# EAGLE board clvHd_EMG-Panel (EAGLE 9.6.2), part 1 of 4
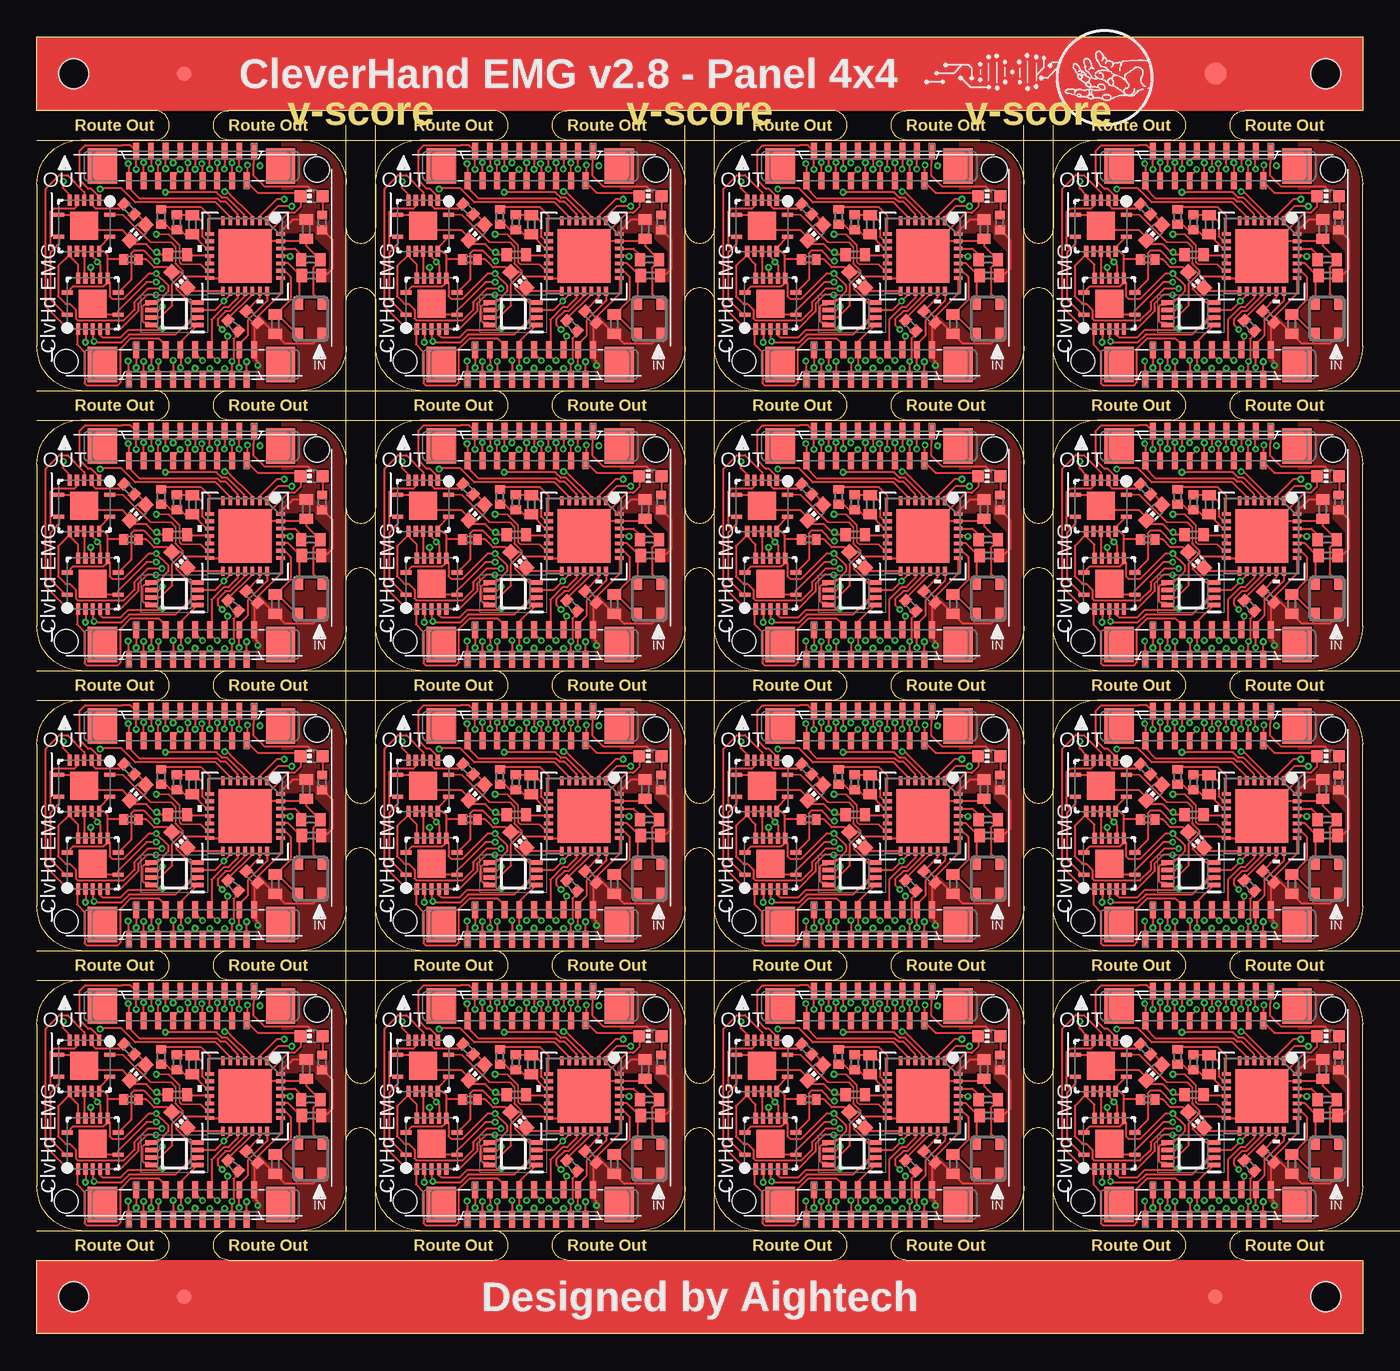
[diagram p0: board, top side]
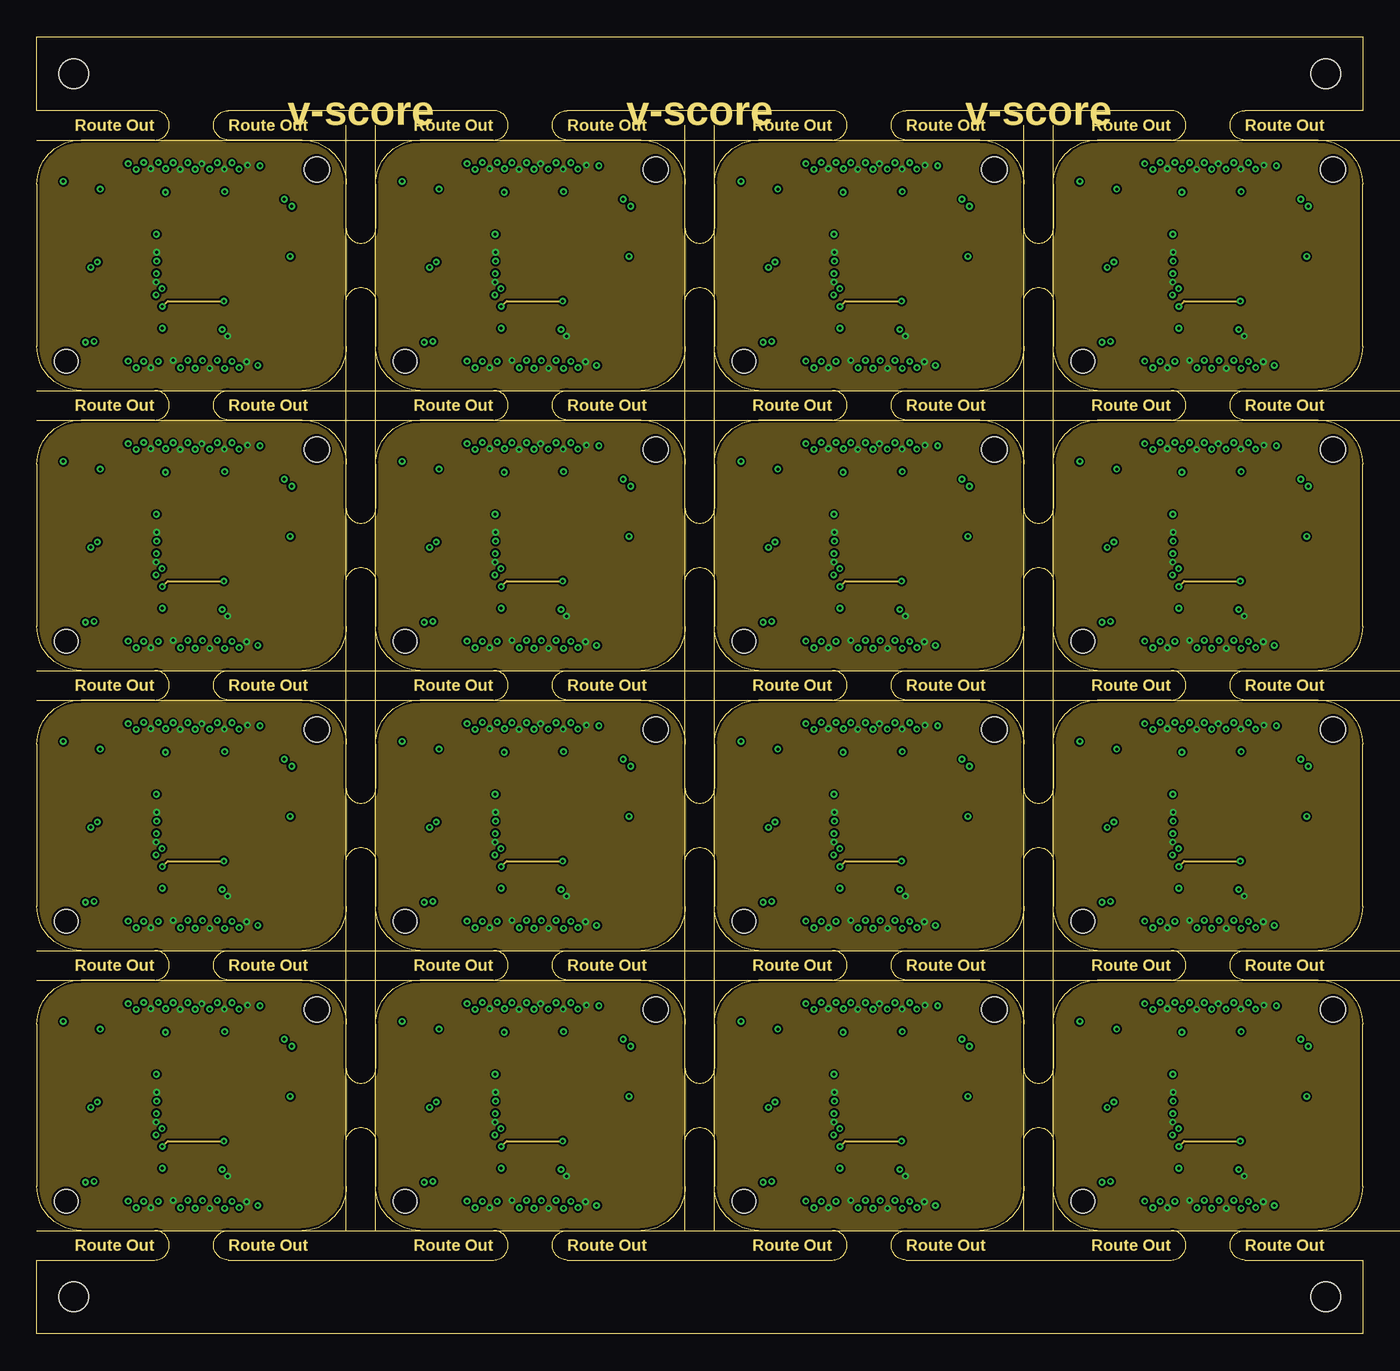
[diagram p1: board, inner layer Route2]
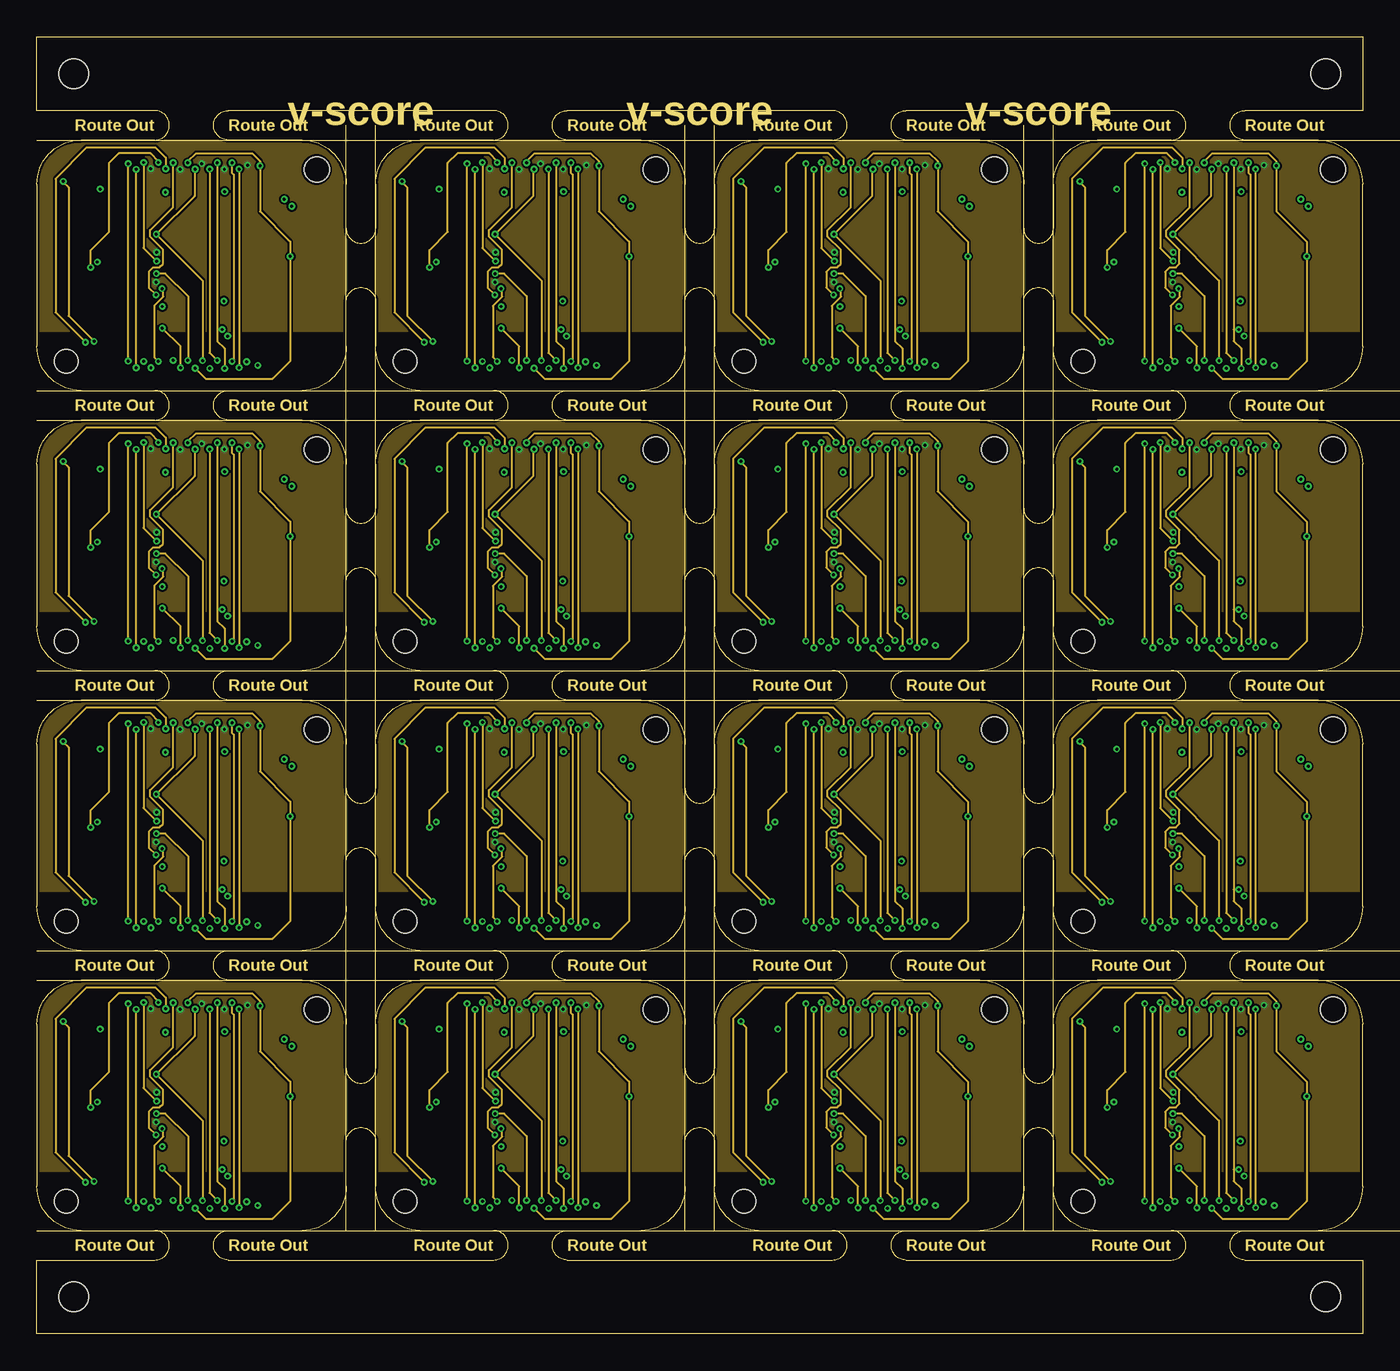
[diagram p2: board, inner layer Route15]
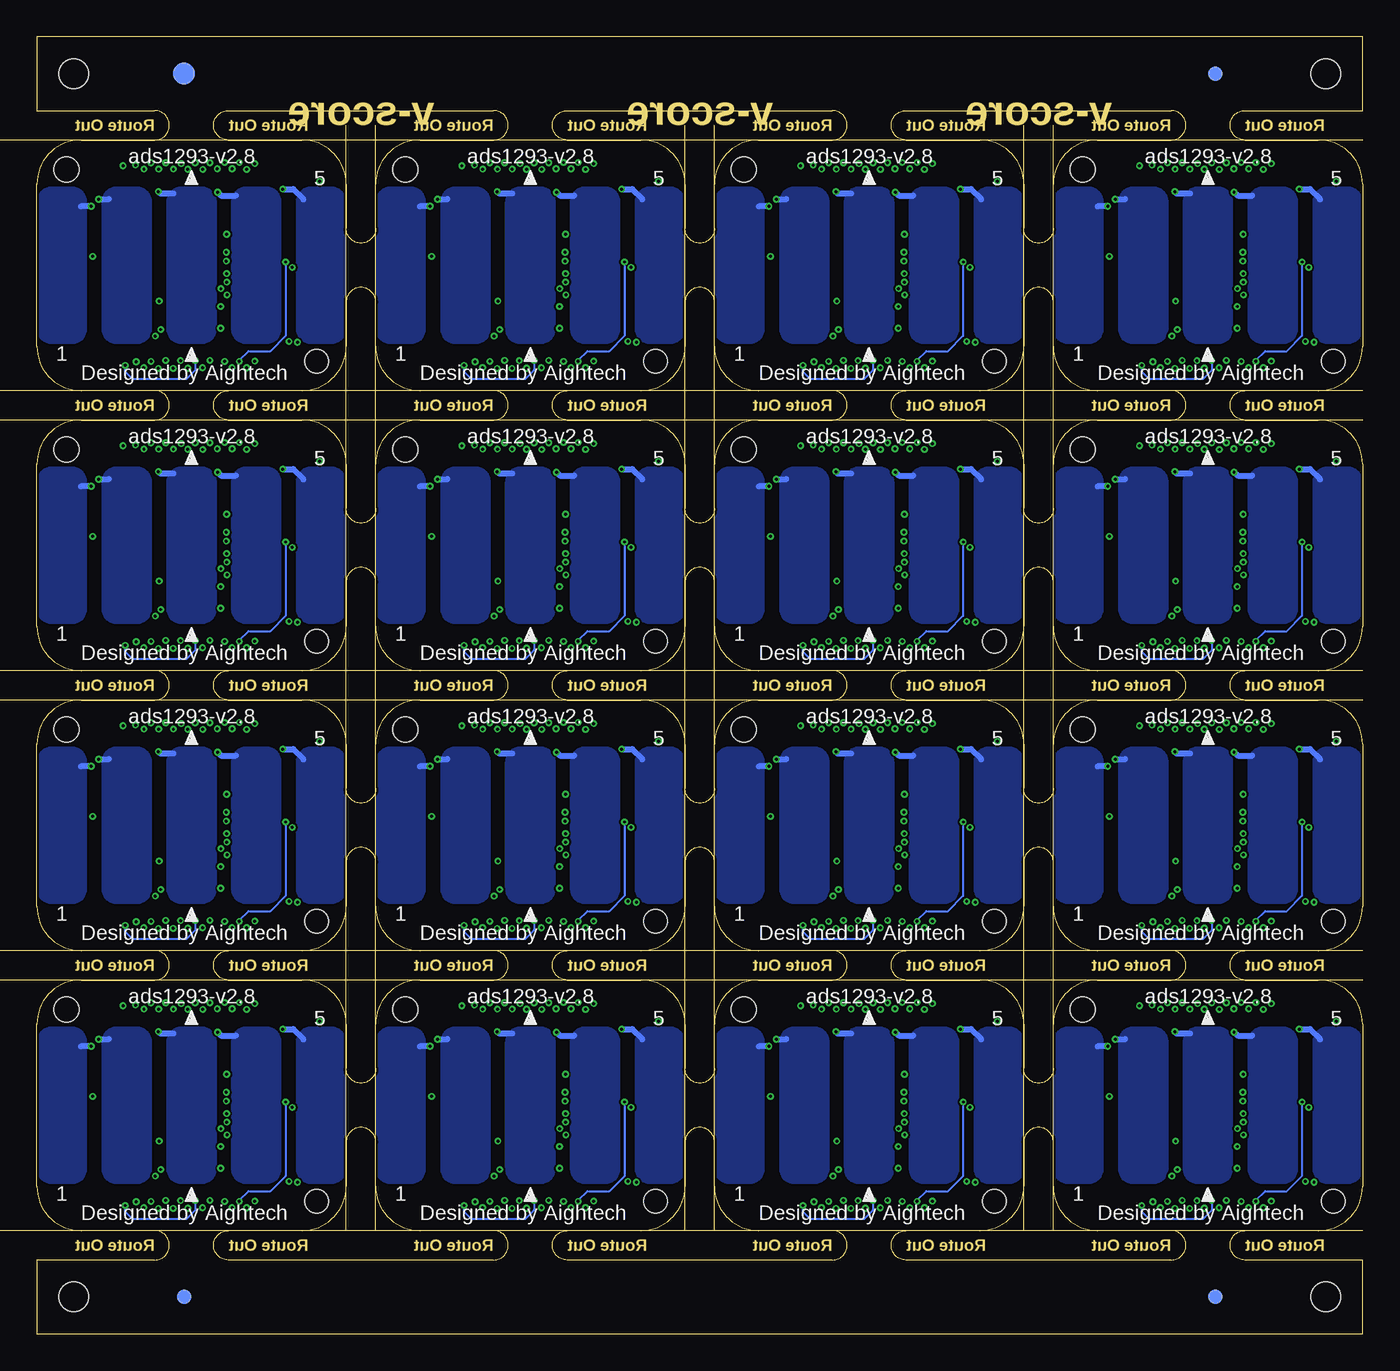
[diagram p3: board, bottom side, seen from below]

Size 90 x 88 mm. Coordinates in mm from the lower left corner, seen from the top.
Outline: 0,21 0,10 arc90 3,7 8,7 arc-180 8,5 0,5 0,0 90,0 90,5 82,5 arc-180 82,7 87,7 arc90 90,10 90,21 arc90 87,24 82,24 arc-180 82,26 87,26 arc90 90,29 90,40 arc90 87,43 82,43 arc-180 82,45 87,45 arc90 90,48 90,59 arc90 87,62 82,62 arc-180 82,64 87,64 arc90 90,67 90,78 arc90 87,81 82,81 arc-180 82,83 90,83 90,88 0,88 0,83 8,83 arc-180 8,81 3,81 arc90 0,78 0,67 arc90 3,64 8,64 arc-180 8,62 3,62 arc90 0,59 0,48 arc90 3,45 8,45 arc-180 8,43 3,43 arc90 0,40 0,29 arc90 3,26 8,26 arc-180 8,24 3,24 arc90 0,21
Outline: 13,7 18,7 arc90 21,10 21,13 arc-180 23,13 23,10 arc90 26,7 31,7 arc-180 31,5 13,5 arc-180 13,7
Outline: 21,18 21,21 arc90 18,24 13,24 arc-180 13,26 18,26 arc90 21,29 21,32 arc-180 23,32 23,29 arc90 26,26 31,26 arc-180 31,24 26,24 arc90 23,21 23,18 arc-180 21,18
Outline: 36,7 41,7 arc90 44,10 44,13 arc-180 46,13 46,10 arc90 49,7 54,7 arc-180 54,5 36,5 arc-180 36,7
Outline: 44,18 44,21 arc90 41,24 36,24 arc-180 36,26 41,26 arc90 44,29 44,32 arc-180 46,32 46,29 arc90 49,26 54,26 arc-180 54,24 49,24 arc90 46,21 46,18 arc-180 44,18
Outline: 59,7 64,7 arc90 67,10 67,13 arc-180 69,13 69,10 arc90 72,7 77,7 arc-180 77,5 59,5 arc-180 59,7
Outline: 67,18 67,21 arc90 64,24 59,24 arc-180 59,26 64,26 arc90 67,29 67,32 arc-180 69,32 69,29 arc90 72,26 77,26 arc-180 77,24 72,24 arc90 69,21 69,18 arc-180 67,18
Outline: 21,37 21,40 arc90 18,43 13,43 arc-180 13,45 18,45 arc90 21,48 21,51 arc-180 23,51 23,48 arc90 26,45 31,45 arc-180 31,43 26,43 arc90 23,40 23,37 arc-180 21,37
Outline: 44,37 44,40 arc90 41,43 36,43 arc-180 36,45 41,45 arc90 44,48 44,51 arc-180 46,51 46,48 arc90 49,45 54,45 arc-180 54,43 49,43 arc90 46,40 46,37 arc-180 44,37
Outline: 67,37 67,40 arc90 64,43 59,43 arc-180 59,45 64,45 arc90 67,48 67,51 arc-180 69,51 69,48 arc90 72,45 77,45 arc-180 77,43 72,43 arc90 69,40 69,37 arc-180 67,37
Outline: 21,56 21,59 arc90 18,62 13,62 arc-180 13,64 18,64 arc90 21,67 21,70 arc-180 23,70 23,67 arc90 26,64 31,64 arc-180 31,62 26,62 arc90 23,59 23,56 arc-180 21,56
Outline: 44,56 44,59 arc90 41,62 36,62 arc-180 36,64 41,64 arc90 44,67 44,70 arc-180 46,70 46,67 arc90 49,64 54,64 arc-180 54,62 49,62 arc90 46,59 46,56 arc-180 44,56
Outline: 67,56 67,59 arc90 64,62 59,62 arc-180 59,64 64,64 arc90 67,67 67,70 arc-180 69,70 69,67 arc90 72,64 77,64 arc-180 77,62 72,62 arc90 69,59 69,56 arc-180 67,56
Outline: 21,75 21,78 arc90 18,81 13,81 arc-180 13,83 31,83 arc-180 31,81 26,81 arc90 23,78 23,75 arc-180 21,75
Outline: 44,75 44,78 arc90 41,81 36,81 arc-180 36,83 54,83 arc-180 54,81 49,81 arc90 46,78 46,75 arc-180 44,75
Outline: 67,75 67,78 arc90 64,81 59,81 arc-180 59,83 77,83 arc-180 77,81 72,81 arc90 69,78 69,75 arc-180 67,75
Copper layers (1*2*15*16): Top 0.035559375mm / dielectric 0.47751875mm / Route2 0.035559375mm / dielectric 0.47751875mm / Route15 0.035559375mm / dielectric 0.47751875mm / Bottom 0.035559375mm
Design rules "clvHd_EMG": minimum track width 3.5mil, minimum drill 0.2mm, track to track 5mil, track to pad 5mil, pad to pad 5mil, via to via 5mil, smd to smd 5mil, copper to edge 7mil, drill to drill 7mil, minimum pad ring 5mil, minimum via ring 5mil, stop-mask expansion 2.5mil, vias tented up to drill 25mil, thermal gap 10mil
Holes 1.6 mm at 2,9 25,9 48,9 71,9 2,28 25,28 48,28 71,28 2,47 25,47 48,47 71,47 2,66 25,66 48,66 71,66
Holes 1.7 mm at 19,22 42,22 65,22 88,22 19,41 42,41 65,41 88,41 19,60 42,60 65,60 88,60 19,79 42,79 65,79 88,79
Holes 2 mm at 2.5,2.5 87.5,2.5 2.5,85.5 87.5,85.5
Milling: 14 lines

## Footprints (pad centres in the part's own frame; a part is rotated, then mirrored left to right if it is on the bottom)
X05C2018TZ = smd 1.15 x 0.4: 1 -1,4.25; 2 1,3.75; 3 -1,3.25; 4 1,2.75; 5 -1,2.25; 6 1,1.75; 7 -1,1.25; 8 1,0.75; 9 -1,0.25; 10 1,-0.25; 11 -1,-0.75; 12 1,-1.25; 13 -1,-1.75; 14 1,-2.25; 15 -1,-2.75; 16 1,-3.25; 17 -1,-3.75; 18 1,-4.25 | smd 2.4 x 2: M1 0,6.05; M2 0,-6.05
RSG28_3P6X3P6_TEX = smd 0.6 x 0.25: 1 -2.4,1.5; 2 -2.4,1; 3 -2.4,0.5; 4 -2.4,0; 5 -2.4,-0.5; 6 -2.4,-1; 7 -2.4,-1.5; 15 2.4,-1.5; 16 2.4,-1; 17 2.4,-0.5; 18 2.4,0; 19 2.4,0.5; 20 2.4,1; 21 2.4,1.5 | smd 0.25 x 0.6: 8 -1.5,-2.4; 9 -1,-2.4; 10 -0.5,-2.4; 11 0,-2.4; 12 0.5,-2.4; 13 1,-2.4; 14 1.5,-2.4; 22 1.5,2.4; 23 1,2.4; 24 0.5,2.4; 25 0,2.4; 26 -0.5,2.4; 27 -1,2.4; 28 -1.5,2.4 | smd 3.6 x 3.6: 29 0,0
C0402 = smd 0.7 x 0.9: 1 -0.65,0; 2 0.65,0
FIDUCIAL-1X2 = smd 1 x 1: 1 0,0
FIDUCIAL-1.5X3 = smd 1.5 x 1.5: 1 0,0
CHIP-LED0603 = smd 0.8 x 0.8: A 0,-0.75; C 0,0.75
VQFN-14-CUSTOM = smd 0.75 x 0.28: 1 -1.725,-0.75; 7 1.725,-0.75; 8 1.725,0.75; 14 -1.725,0.75 | smd 0.28 x 0.75: 2 -1,-1.725; 3 -0.5,-1.725; 4 0,-1.725; 5 0.5,-1.725; 6 1,-1.725; 9 1,1.725; 10 0.5,1.725; 11 0,1.725; 12 -0.5,1.725; 13 -1,1.725 | smd 1.9 x 1.9: 15 0,0
VSSOP = smd 0.85 x 0.3: 1 -1.575,0.75; 2 -1.575,0.25; 3 -1.575,-0.25; 4 -1.575,-0.75; 5 1.575,-0.75; 6 1.575,-0.25; 7 1.575,0.25; 8 1.575,0.75
R0402 = smd 0.6 x 0.7: 1 -0.5,0; 2 0.5,0
R0402' = smd 0.6 x 0.7: 1 -0.55,0; 2 0.55,0
SMD-3225_4P = smd 0.9 x 0.65: 1 -1.05,-0.825; 2 1.05,-0.825; 3 1.05,0.825; 4 -1.05,0.825

## Placement (x,y rotation side)
1  X05C2018TZ  [X05C2018TZ]  10.5,8.77 90 top
2  X05C2018TZ  [X05C2018TZ]  10.5,22.23 270 top
3  X05C2018TZ  [X05C2018TZ]  33.5,22.23 270 top
4  X05C2018TZ  [X05C2018TZ]  33.5,8.77 90 top
5  X05C2018TZ  [X05C2018TZ]  56.5,22.23 270 top
6  X05C2018TZ  [X05C2018TZ]  56.5,8.77 90 top
7  X05C2018TZ  [X05C2018TZ]  79.5,22.23 270 top
8  X05C2018TZ  [X05C2018TZ]  79.5,8.77 90 top
9  X05C2018TZ  [X05C2018TZ]  10.5,41.23 270 top
10  X05C2018TZ  [X05C2018TZ]  10.5,27.77 90 top
11  X05C2018TZ  [X05C2018TZ]  33.5,41.23 270 top
12  X05C2018TZ  [X05C2018TZ]  33.5,27.77 90 top
13  X05C2018TZ  [X05C2018TZ]  56.5,41.23 270 top
14  X05C2018TZ  [X05C2018TZ]  56.5,27.77 90 top
15  X05C2018TZ  [X05C2018TZ]  79.5,41.23 270 top
16  X05C2018TZ  [X05C2018TZ]  79.5,27.77 90 top
17  X05C2018TZ  [X05C2018TZ]  10.5,60.23 270 top
18  X05C2018TZ  [X05C2018TZ]  10.5,46.77 90 top
19  X05C2018TZ  [X05C2018TZ]  33.5,60.23 270 top
20  X05C2018TZ  [X05C2018TZ]  33.5,46.77 90 top
21  X05C2018TZ  [X05C2018TZ]  56.5,60.23 270 top
22  X05C2018TZ  [X05C2018TZ]  56.5,46.77 90 top
23  X05C2018TZ  [X05C2018TZ]  79.5,60.23 270 top
24  X05C2018TZ  [X05C2018TZ]  79.5,46.77 90 top
25  X05C2018TZ  [X05C2018TZ]  10.5,79.23 270 top
26  X05C2018TZ  [X05C2018TZ]  10.5,65.77 90 top
27  X05C2018TZ  [X05C2018TZ]  33.5,79.23 270 top
28  X05C2018TZ  [X05C2018TZ]  33.5,65.77 90 top
29  X05C2018TZ  [X05C2018TZ]  56.5,79.23 270 top
30  X05C2018TZ  [X05C2018TZ]  56.5,65.77 90 top
31  X05C2018TZ  [X05C2018TZ]  79.5,79.23 270 top
32  X05C2018TZ  [X05C2018TZ]  79.5,65.77 90 top
ADC  ADS1293CISQ/NOPB  [RSG28_3P6X3P6_TEX]  14.14,16.13 270 top
ADC1  ADS1293CISQ/NOPB  [RSG28_3P6X3P6_TEX]  37.14,16.13 270 top
ADC2  ADS1293CISQ/NOPB  [RSG28_3P6X3P6_TEX]  60.14,16.13 270 top
ADC3  ADS1293CISQ/NOPB  [RSG28_3P6X3P6_TEX]  83.14,16.13 270 top
ADC4  ADS1293CISQ/NOPB  [RSG28_3P6X3P6_TEX]  14.14,35.13 270 top
ADC5  ADS1293CISQ/NOPB  [RSG28_3P6X3P6_TEX]  37.14,35.13 270 top
ADC6  ADS1293CISQ/NOPB  [RSG28_3P6X3P6_TEX]  60.14,35.13 270 top
ADC7  ADS1293CISQ/NOPB  [RSG28_3P6X3P6_TEX]  83.14,35.13 270 top
ADC8  ADS1293CISQ/NOPB  [RSG28_3P6X3P6_TEX]  14.14,54.13 270 top
ADC9  ADS1293CISQ/NOPB  [RSG28_3P6X3P6_TEX]  37.14,54.13 270 top
ADC10  ADS1293CISQ/NOPB  [RSG28_3P6X3P6_TEX]  60.14,54.13 270 top
ADC11  ADS1293CISQ/NOPB  [RSG28_3P6X3P6_TEX]  83.14,54.13 270 top
ADC12  ADS1293CISQ/NOPB  [RSG28_3P6X3P6_TEX]  14.14,73.13 270 top
ADC13  ADS1293CISQ/NOPB  [RSG28_3P6X3P6_TEX]  37.14,73.13 270 top
ADC14  ADS1293CISQ/NOPB  [RSG28_3P6X3P6_TEX]  60.14,73.13 270 top
ADC15  ADS1293CISQ/NOPB  [RSG28_3P6X3P6_TEX]  83.14,73.13 270 top
C1  22pF  [C0402]  16.19,11.5 90 top
C2  22pF  [C0402]  18.65,14.8 180 top
C3  1nF  [C0402]  10.57,18.25 90 top
C4  100nF  [C0402]  18.29,17.95 270 top
C5  100nF  [C0402]  9.56,16.21 180 top
C6  1uF  [C0402]  18.59,15.88 0 top
C7  22pF  [C0402]  41.65,14.8 180 top
C8  22pF  [C0402]  39.19,11.5 90 top
C9  100nF  [C0402]  32.56,16.21 180 top
C10  1nF  [C0402]  33.57,18.25 90 top
C11  100nF  [C0402]  41.29,17.95 270 top
C12  1uF  [C0402]  41.59,15.88 0 top
C13  22pF  [C0402]  64.65,14.8 180 top
C14  22pF  [C0402]  62.19,11.5 90 top
C15  100nF  [C0402]  55.56,16.21 180 top
C16  1nF  [C0402]  56.57,18.25 90 top
C17  100nF  [C0402]  64.29,17.95 270 top
C18  1uF  [C0402]  64.59,15.88 0 top
C19  22pF  [C0402]  87.65,14.8 180 top
C20  22pF  [C0402]  85.19,11.5 90 top
C21  100nF  [C0402]  78.56,16.21 180 top
C22  1nF  [C0402]  79.57,18.25 90 top
C23  100nF  [C0402]  87.29,17.95 270 top
C24  1uF  [C0402]  87.59,15.88 0 top
C25  22pF  [C0402]  18.65,33.8 180 top
C26  22pF  [C0402]  16.19,30.5 90 top
C27  100nF  [C0402]  9.56,35.21 180 top
C28  1nF  [C0402]  10.57,37.25 90 top
C29  100nF  [C0402]  18.29,36.95 270 top
C30  1uF  [C0402]  18.59,34.88 0 top
C31  22pF  [C0402]  41.65,33.8 180 top
C32  22pF  [C0402]  39.19,30.5 90 top
C33  100nF  [C0402]  32.56,35.21 180 top
C34  1nF  [C0402]  33.57,37.25 90 top
C35  100nF  [C0402]  41.29,36.95 270 top
C36  1uF  [C0402]  41.59,34.88 0 top
C37  22pF  [C0402]  64.65,33.8 180 top
C38  22pF  [C0402]  62.19,30.5 90 top
C39  100nF  [C0402]  55.56,35.21 180 top
C40  1nF  [C0402]  56.57,37.25 90 top
C41  100nF  [C0402]  64.29,36.95 270 top
C42  1uF  [C0402]  64.59,34.88 0 top
C43  22pF  [C0402]  87.65,33.8 180 top
C44  22pF  [C0402]  85.19,30.5 90 top
C45  100nF  [C0402]  78.56,35.21 180 top
C46  1nF  [C0402]  79.57,37.25 90 top
C47  100nF  [C0402]  87.29,36.95 270 top
C48  1uF  [C0402]  87.59,34.88 0 top
C49  22pF  [C0402]  18.65,52.8 180 top
C50  22pF  [C0402]  16.19,49.5 90 top
C51  100nF  [C0402]  9.56,54.21 180 top
C52  1nF  [C0402]  10.57,56.25 90 top
C53  100nF  [C0402]  18.29,55.95 270 top
C54  1uF  [C0402]  18.59,53.88 0 top
C55  22pF  [C0402]  41.65,52.8 180 top
C56  22pF  [C0402]  39.19,49.5 90 top
C57  100nF  [C0402]  32.56,54.21 180 top
C58  1nF  [C0402]  33.57,56.25 90 top
C59  100nF  [C0402]  41.29,55.95 270 top
C60  1uF  [C0402]  41.59,53.88 0 top
C61  22pF  [C0402]  64.65,52.8 180 top
C62  22pF  [C0402]  62.19,49.5 90 top
C63  100nF  [C0402]  55.56,54.21 180 top
C64  1nF  [C0402]  56.57,56.25 90 top
C65  100nF  [C0402]  64.29,55.95 270 top
C66  1uF  [C0402]  64.59,53.88 0 top
C67  22pF  [C0402]  87.65,52.8 180 top
C68  22pF  [C0402]  85.19,49.5 90 top
C69  100nF  [C0402]  78.56,54.21 180 top
C70  1nF  [C0402]  79.57,56.25 90 top
C71  100nF  [C0402]  87.29,55.95 270 top
C72  1uF  [C0402]  87.59,53.88 0 top
C73  22pF  [C0402]  18.65,71.8 180 top
C74  22pF  [C0402]  16.19,68.5 90 top
C75  100nF  [C0402]  9.56,73.21 180 top
C76  1nF  [C0402]  10.57,75.25 90 top
C77  100nF  [C0402]  18.29,74.95 270 top
C78  1uF  [C0402]  18.59,72.88 0 top
C79  22pF  [C0402]  41.65,71.8 180 top
C80  22pF  [C0402]  39.19,68.5 90 top
C81  100nF  [C0402]  32.56,73.21 180 top
C82  1nF  [C0402]  33.57,75.25 90 top
C83  100nF  [C0402]  41.29,74.95 270 top
C84  1uF  [C0402]  41.59,72.88 0 top
C85  22pF  [C0402]  64.65,71.8 180 top
C86  22pF  [C0402]  62.19,68.5 90 top
C87  100nF  [C0402]  55.56,73.21 180 top
C88  1nF  [C0402]  56.57,75.25 90 top
C89  100nF  [C0402]  64.29,74.95 270 top
C90  1uF  [C0402]  64.59,72.88 0 top
C91  22pF  [C0402]  87.65,71.8 180 top
C92  22pF  [C0402]  85.19,68.5 90 top
C93  100nF  [C0402]  78.56,73.21 180 top
C94  1nF  [C0402]  79.57,75.25 90 top
C95  100nF  [C0402]  87.29,74.95 270 top
C96  1uF  [C0402]  87.59,72.88 0 top
E$1  [FIDUCIAL-1X2]  10,2.5 0 top
E$2  [FIDUCIAL-1X2]  10,2.5 0 bottom
E$3  [FIDUCIAL-1X2]  80,2.5 0 top
E$4  [FIDUCIAL-1X2]  80,2.5 0 bottom
E$5  [FIDUCIAL-1X2]  10,85.5 0 top
E$6  [FIDUCIAL-1X2]  10,85.5 0 bottom
E$7  [FIDUCIAL-1.5X3]  80,85.5 0 top
E$8  [FIDUCIAL-1.5X3]  80,85.5 0 bottom
L1  Green  [CHIP-LED0603]  18.65,20.19 90 top
L2  Red  [CHIP-LED0603]  9.69,14.51 225 top
L3  White  [CHIP-LED0603]  6.85,17.72 135 top
L4  Red  [CHIP-LED0603]  32.69,14.51 225 top
L5  Green  [CHIP-LED0603]  41.65,20.19 90 top
L6  White  [CHIP-LED0603]  29.85,17.72 135 top
L7  Red  [CHIP-LED0603]  55.69,14.51 225 top
L8  Green  [CHIP-LED0603]  64.65,20.19 90 top
L9  White  [CHIP-LED0603]  52.85,17.72 135 top
L10  Red  [CHIP-LED0603]  78.69,14.51 225 top
L11  Green  [CHIP-LED0603]  87.65,20.19 90 top
L12  White  [CHIP-LED0603]  75.85,17.72 135 top
L13  Red  [CHIP-LED0603]  9.69,33.51 225 top
L14  Green  [CHIP-LED0603]  18.65,39.19 90 top
L15  White  [CHIP-LED0603]  6.85,36.72 135 top
L16  Red  [CHIP-LED0603]  32.69,33.51 225 top
L17  Green  [CHIP-LED0603]  41.65,39.19 90 top
L18  White  [CHIP-LED0603]  29.85,36.72 135 top
L19  Red  [CHIP-LED0603]  55.69,33.51 225 top
L20  Green  [CHIP-LED0603]  64.65,39.19 90 top
L21  White  [CHIP-LED0603]  52.85,36.72 135 top
L22  Red  [CHIP-LED0603]  78.69,33.51 225 top
L23  Green  [CHIP-LED0603]  87.65,39.19 90 top
L24  White  [CHIP-LED0603]  75.85,36.72 135 top
L25  Red  [CHIP-LED0603]  9.69,52.51 225 top
L26  Green  [CHIP-LED0603]  18.65,58.19 90 top
L27  White  [CHIP-LED0603]  6.85,55.72 135 top
L28  Red  [CHIP-LED0603]  32.69,52.51 225 top
L29  Green  [CHIP-LED0603]  41.65,58.19 90 top
L30  White  [CHIP-LED0603]  29.85,55.72 135 top
L31  Red  [CHIP-LED0603]  55.69,52.51 225 top
L32  Green  [CHIP-LED0603]  64.65,58.19 90 top
L33  White  [CHIP-LED0603]  52.85,55.72 135 top
L34  Red  [CHIP-LED0603]  78.69,52.51 225 top
L35  Green  [CHIP-LED0603]  87.65,58.19 90 top
L36  White  [CHIP-LED0603]  75.85,55.72 135 top
L37  Red  [CHIP-LED0603]  9.69,71.51 225 top
L38  Green  [CHIP-LED0603]  18.65,77.19 90 top
L39  White  [CHIP-LED0603]  6.85,74.72 135 top
L40  Red  [CHIP-LED0603]  32.69,71.51 225 top
L41  Green  [CHIP-LED0603]  41.65,77.19 90 top
L42  White  [CHIP-LED0603]  29.85,74.72 135 top
L43  Red  [CHIP-LED0603]  55.69,71.51 225 top
L44  Green  [CHIP-LED0603]  64.65,77.19 90 top
L45  White  [CHIP-LED0603]  52.85,74.72 135 top
L46  Red  [CHIP-LED0603]  78.69,71.51 225 top
L47  Green  [CHIP-LED0603]  87.65,77.19 90 top
L48  White  [CHIP-LED0603]  75.85,74.72 135 top
L_AND  SN74ALVC08  [VQFN-14-CUSTOM]  3.23,18.18 180 top
L_AND1  SN74ALVC08  [VQFN-14-CUSTOM]  26.23,18.18 180 top
L_AND2  SN74ALVC08  [VQFN-14-CUSTOM]  49.23,18.18 180 top
L_AND3  SN74ALVC08  [VQFN-14-CUSTOM]  72.22,18.18 180 top
L_AND4  SN74ALVC08  [VQFN-14-CUSTOM]  3.23,37.17 180 top
L_AND5  SN74ALVC08  [VQFN-14-CUSTOM]  26.23,37.17 180 top
L_AND6  SN74ALVC08  [VQFN-14-CUSTOM]  49.23,37.17 180 top
L_AND7  SN74ALVC08  [VQFN-14-CUSTOM]  72.22,37.17 180 top
L_AND8  SN74ALVC08  [VQFN-14-CUSTOM]  3.23,56.17 180 top
L_AND9  SN74ALVC08  [VQFN-14-CUSTOM]  26.23,56.17 180 top
L_AND10  SN74ALVC08  [VQFN-14-CUSTOM]  49.23,56.17 180 top
L_AND11  SN74ALVC08  [VQFN-14-CUSTOM]  72.22,56.17 180 top
L_AND12  SN74ALVC08  [VQFN-14-CUSTOM]  3.23,75.17 180 top
L_AND13  SN74ALVC08  [VQFN-14-CUSTOM]  26.23,75.17 180 top
L_AND14  SN74ALVC08  [VQFN-14-CUSTOM]  49.23,75.17 180 top
L_AND15  SN74ALVC08  [VQFN-14-CUSTOM]  72.22,75.17 180 top
L_NAND  SN74AUP2G00  [VSSOP]  9.34,12.21 180 top
L_NAND1  SN74AUP2G00  [VSSOP]  32.34,12.21 180 top
L_NAND2  SN74AUP2G00  [VSSOP]  55.34,12.21 180 top
L_NAND3  SN74AUP2G00  [VSSOP]  78.34,12.21 180 top
L_NAND4  SN74AUP2G00  [VSSOP]  9.34,31.21 180 top
L_NAND5  SN74AUP2G00  [VSSOP]  32.34,31.21 180 top
L_NAND6  SN74AUP2G00  [VSSOP]  55.34,31.21 180 top
L_NAND7  SN74AUP2G00  [VSSOP]  78.34,31.21 180 top
L_NAND8  SN74AUP2G00  [VSSOP]  9.34,50.21 180 top
L_NAND9  SN74AUP2G00  [VSSOP]  32.34,50.21 180 top
L_NAND10  SN74AUP2G00  [VSSOP]  55.34,50.21 180 top
L_NAND11  SN74AUP2G00  [VSSOP]  78.34,50.21 180 top
L_NAND12  SN74AUP2G00  [VSSOP]  9.34,69.21 180 top
L_NAND13  SN74AUP2G00  [VSSOP]  32.34,69.21 180 top
L_NAND14  SN74AUP2G00  [VSSOP]  55.34,69.21 180 top
L_NAND15  SN74AUP2G00  [VSSOP]  78.34,69.21 180 top
L_XOR  SN74LVC86  [VQFN-14-CUSTOM]  3.8,12.9 0 top
L_XOR1  SN74LVC86  [VQFN-14-CUSTOM]  26.8,12.9 0 top
L_XOR2  SN74LVC86  [VQFN-14-CUSTOM]  49.8,12.9 0 top
L_XOR3  SN74LVC86  [VQFN-14-CUSTOM]  72.8,12.9 0 top
L_XOR4  SN74LVC86  [VQFN-14-CUSTOM]  3.8,31.9 0 top
L_XOR5  SN74LVC86  [VQFN-14-CUSTOM]  26.8,31.9 0 top
L_XOR6  SN74LVC86  [VQFN-14-CUSTOM]  49.8,31.9 0 top
L_XOR7  SN74LVC86  [VQFN-14-CUSTOM]  72.8,31.9 0 top
L_XOR8  SN74LVC86  [VQFN-14-CUSTOM]  3.8,50.9 0 top
L_XOR9  SN74LVC86  [VQFN-14-CUSTOM]  26.8,50.9 0 top
L_XOR10  SN74LVC86  [VQFN-14-CUSTOM]  49.8,50.9 0 top
L_XOR11  SN74LVC86  [VQFN-14-CUSTOM]  72.8,50.9 0 top
L_XOR12  SN74LVC86  [VQFN-14-CUSTOM]  3.8,69.9 0 top
L_XOR13  SN74LVC86  [VQFN-14-CUSTOM]  26.8,69.9 0 top
L_XOR14  SN74LVC86  [VQFN-14-CUSTOM]  49.8,69.9 0 top
L_XOR15  SN74LVC86  [VQFN-14-CUSTOM]  72.8,69.9 0 top
R1  51  [R0402]  19.37,18.41 90 top
R2  51  [R0402]  13.32,11.4 315 top
R3  51  [R0402]  6.26,19.3 135 top
R4  51  [R0402]  6.4,15.9 180 top
R5  10k  [R0402]  8.44,18.78 270 top
R6  1M  [R0402']  14.6,12 315 top
R7  10M  [R0402]  9.51,18.42 270 top
R8  51  [R0402]  36.32,11.4 315 top
R9  51  [R0402]  29.4,15.9 180 top
R10  1M  [R0402']  37.6,12 315 top
R11  10k  [R0402]  31.44,18.78 270 top
R12  10M  [R0402]  32.51,18.42 270 top
R13  51  [R0402]  42.37,18.41 90 top
R14  51  [R0402]  29.26,19.3 135 top
R15  51  [R0402]  59.32,11.4 315 top
R16  51  [R0402]  52.4,15.9 180 top
R17  1M  [R0402']  60.6,12 315 top
R18  10k  [R0402]  54.44,18.78 270 top
R19  10M  [R0402]  55.51,18.42 270 top
R20  51  [R0402]  65.37,18.41 90 top
R21  51  [R0402]  52.26,19.3 135 top
R22  51  [R0402]  82.32,11.4 315 top
R23  51  [R0402]  75.4,15.9 180 top
R24  1M  [R0402']  83.6,12 315 top
R25  10k  [R0402]  77.44,18.78 270 top
R26  10M  [R0402]  78.51,18.42 270 top
R27  51  [R0402]  88.37,18.41 90 top
R28  51  [R0402]  75.26,19.3 135 top
R29  51  [R0402]  13.32,30.4 315 top
R30  51  [R0402]  6.4,34.9 180 top
R31  1M  [R0402']  14.6,31 315 top
R32  10k  [R0402]  8.44,37.78 270 top
R33  10M  [R0402]  9.51,37.42 270 top
R34  51  [R0402]  19.37,37.41 90 top
R35  51  [R0402]  6.26,38.3 135 top
R36  51  [R0402]  36.32,30.4 315 top
R37  51  [R0402]  29.4,34.9 180 top
R38  1M  [R0402']  37.6,31 315 top
R39  10k  [R0402]  31.44,37.78 270 top
R40  10M  [R0402]  32.51,37.42 270 top
R41  51  [R0402]  42.37,37.41 90 top
R42  51  [R0402]  29.26,38.3 135 top
R43  51  [R0402]  59.32,30.4 315 top
R44  51  [R0402]  52.4,34.9 180 top
R45  1M  [R0402']  60.6,31 315 top
R46  10k  [R0402]  54.44,37.78 270 top
R47  10M  [R0402]  55.51,37.42 270 top
R48  51  [R0402]  65.37,37.41 90 top
R49  51  [R0402]  52.26,38.3 135 top
R50  51  [R0402]  82.32,30.4 315 top
R51  51  [R0402]  75.4,34.9 180 top
R52  1M  [R0402']  83.6,31 315 top
R53  10k  [R0402]  77.44,37.78 270 top
R54  10M  [R0402]  78.51,37.42 270 top
R55  51  [R0402]  88.37,37.41 90 top
R56  51  [R0402]  75.26,38.3 135 top
R57  51  [R0402]  13.32,49.4 315 top
R58  51  [R0402]  6.4,53.9 180 top
R59  1M  [R0402']  14.6,50 315 top
R60  10k  [R0402]  8.44,56.78 270 top
R61  10M  [R0402]  9.51,56.42 270 top
R62  51  [R0402]  19.37,56.41 90 top
R63  51  [R0402]  6.26,57.3 135 top
R64  51  [R0402]  36.32,49.4 315 top
R65  51  [R0402]  29.4,53.9 180 top
R66  1M  [R0402']  37.6,50 315 top
R67  10k  [R0402]  31.44,56.78 270 top
R68  10M  [R0402]  32.51,56.42 270 top
R69  51  [R0402]  42.37,56.41 90 top
R70  51  [R0402]  29.26,57.3 135 top
R71  51  [R0402]  59.32,49.4 315 top
R72  51  [R0402]  52.4,53.9 180 top
R73  1M  [R0402']  60.6,50 315 top
R74  10k  [R0402]  54.44,56.78 270 top
R75  10M  [R0402]  55.51,56.42 270 top
R76  51  [R0402]  65.37,56.41 90 top
R77  51  [R0402]  52.26,57.3 135 top
R78  51  [R0402]  82.32,49.4 315 top
R79  51  [R0402]  75.4,53.9 180 top
R80  1M  [R0402']  83.6,50 315 top
R81  10k  [R0402]  77.44,56.78 270 top
R82  10M  [R0402]  78.51,56.42 270 top
R83  51  [R0402]  88.37,56.41 90 top
R84  51  [R0402]  75.26,57.3 135 top
R85  51  [R0402]  13.32,68.4 315 top
R86  51  [R0402]  6.4,72.9 180 top
R87  1M  [R0402']  14.6,69 315 top
R88  10k  [R0402]  8.44,75.78 270 top
R89  10M  [R0402]  9.51,75.42 270 top
R90  51  [R0402]  19.37,75.41 90 top
R91  51  [R0402]  6.26,76.3 135 top
R92  51  [R0402]  36.32,68.4 315 top
R93  51  [R0402]  29.4,72.9 180 top
R94  1M  [R0402']  37.6,69 315 top
R95  10k  [R0402]  31.44,75.78 270 top
R96  10M  [R0402]  32.51,75.42 270 top
R97  51  [R0402]  42.37,75.41 90 top
R98  51  [R0402]  29.26,76.3 135 top
R99  51  [R0402]  59.32,68.4 315 top
R100  51  [R0402]  52.4,72.9 180 top
R101  1M  [R0402']  60.6,69 315 top
R102  10k  [R0402]  54.44,75.78 270 top
R103  10M  [R0402]  55.51,75.42 270 top
R104  51  [R0402]  65.37,75.41 90 top
R105  51  [R0402]  52.26,76.3 135 top
R106  51  [R0402]  82.32,68.4 315 top
R107  51  [R0402]  75.4,72.9 180 top
R108  1M  [R0402']  83.6,69 315 top
R109  10k  [R0402]  77.44,75.78 270 top
R110  10M  [R0402]  78.51,75.42 270 top
R111  51  [R0402]  88.37,75.41 90 top
R112  51  [R0402]  75.26,76.3 135 top
TAL  C387328  [SMD-3225_4P]  18.57,11.87 90 top
TAL1  C387328  [SMD-3225_4P]  41.58,11.87 90 top
TAL2  C387328  [SMD-3225_4P]  64.58,11.87 90 top
TAL3  C387328  [SMD-3225_4P]  87.58,11.87 90 top
TAL4  C387328  [SMD-3225_4P]  18.57,30.87 90 top
TAL5  C387328  [SMD-3225_4P]  41.58,30.87 90 top
TAL6  C387328  [SMD-3225_4P]  64.58,30.87 90 top
TAL7  C387328  [SMD-3225_4P]  87.58,30.87 90 top
TAL8  C387328  [SMD-3225_4P]  18.57,49.87 90 top
TAL9  C387328  [SMD-3225_4P]  41.58,49.87 90 top
TAL10  C387328  [SMD-3225_4P]  64.58,49.87 90 top
TAL11  C387328  [SMD-3225_4P]  87.58,49.87 90 top
TAL12  C387328  [SMD-3225_4P]  18.57,68.87 90 top
TAL13  C387328  [SMD-3225_4P]  41.58,68.87 90 top
TAL14  C387328  [SMD-3225_4P]  64.58,68.87 90 top
TAL15  C387328  [SMD-3225_4P]  87.58,68.87 90 top

## Library data of the parts
1-32 = con-omron
ADC ADC1-ADC15 = ADS; BUILT_BY: EMA_UL_Team; MANUFACTURER_PART_NUMBER: ADS1293CISQ/NOPB; SOURCELIBRARY: TI_2016-05-20; VENDOR: Texas Instruments
C1-C96 = rcl; SPICEPREFIX: C
E$1-E$6 = SparkFun-Aesthetics
E$7 E$8 = SparkFun-Retired
L1-L48 = led
L_AND L_AND1-L_AND15 L_XOR L_XOR1-L_XOR15 = SamacSys_Parts
L_NAND L_NAND1-L_NAND15 = 1persoLib
R1-R5 R7-R9 R11-R16 R18-R23 R25-R30 R32-R37 R39-R44 R46-R51 R53-R58 R60-R65 R67-R72 R74-R79 R81-R86 R88-R93 R95-R100 R102-R107 R109-R112 = rcl; SPICEPREFIX: R
R6 R10 R17 R24 R31 R38 R45 R52 R59 R66 R73 R80 R87 R94 R101 R108 = rclCustom; SPICEPREFIX: R
TAL TAL1-TAL15 = crystalCustom; OC_FARNELL: unknown; OC_NEWARK: unknown

## Nets
A0: 1.3 L_AND.12 L_XOR.10
A1: 1.5 L_AND.9 L_XOR.13
A2: 1.6 L_AND.4 L_XOR.2
A3: 1.8 L_NAND.1 L_XOR.5
A4: 4.5 L_AND1.9 L_XOR1.13
A5: 4.6 L_AND1.4 L_XOR1.2
A6: 4.8 L_NAND1.1 L_XOR1.5
A7: 4.3 L_AND1.12 L_XOR1.10
A8: 6.5 L_AND2.9 L_XOR2.13
A9: 6.6 L_AND2.4 L_XOR2.2
A10: 6.8 L_NAND2.1 L_XOR2.5
A11: 6.3 L_AND2.12 L_XOR2.10
A12: 8.5 L_AND3.9 L_XOR3.13
A13: 8.6 L_AND3.4 L_XOR3.2
A14: 8.8 L_NAND3.1 L_XOR3.5
A15: 8.3 L_AND3.12 L_XOR3.10
A16: 10.5 L_AND4.9 L_XOR4.13
A17: 10.6 L_AND4.4 L_XOR4.2
A18: 10.8 L_NAND4.1 L_XOR4.5
A19: 10.3 L_AND4.12 L_XOR4.10
A20: 12.5 L_AND5.9 L_XOR5.13
A21: 12.6 L_AND5.4 L_XOR5.2
A22: 12.8 L_NAND5.1 L_XOR5.5
A23: 12.3 L_AND5.12 L_XOR5.10
A24: 14.5 L_AND6.9 L_XOR6.13
A25: 14.6 L_AND6.4 L_XOR6.2
A26: 14.8 L_NAND6.1 L_XOR6.5
A27: 14.3 L_AND6.12 L_XOR6.10
A28: 16.5 L_AND7.9 L_XOR7.13
A29: 16.6 L_AND7.4 L_XOR7.2
A30: 16.8 L_NAND7.1 L_XOR7.5
A31: 16.3 L_AND7.12 L_XOR7.10
A32: 18.5 L_AND8.9 L_XOR8.13
A33: 18.6 L_AND8.4 L_XOR8.2
A34: 18.8 L_NAND8.1 L_XOR8.5
A35: 18.3 L_AND8.12 L_XOR8.10
A36: 20.5 L_AND9.9 L_XOR9.13
A37: 20.6 L_AND9.4 L_XOR9.2
A38: 20.8 L_NAND9.1 L_XOR9.5
A39: 20.3 L_AND9.12 L_XOR9.10
A40: 22.5 L_AND10.9 L_XOR10.13
A41: 22.6 L_AND10.4 L_XOR10.2
A42: 22.8 L_NAND10.1 L_XOR10.5
A43: 22.3 L_AND10.12 L_XOR10.10
A44: 24.5 L_AND11.9 L_XOR11.13
A45: 24.6 L_AND11.4 L_XOR11.2
A46: 24.8 L_NAND11.1 L_XOR11.5
A47: 24.3 L_AND11.12 L_XOR11.10
A48: 26.5 L_AND12.9 L_XOR12.13
A49: 26.6 L_AND12.4 L_XOR12.2
A50: 26.8 L_NAND12.1 L_XOR12.5
A51: 26.3 L_AND12.12 L_XOR12.10
A52: 28.5 L_AND13.9 L_XOR13.13
A53: 28.6 L_AND13.4 L_XOR13.2
A54: 28.8 L_NAND13.1 L_XOR13.5
A55: 28.3 L_AND13.12 L_XOR13.10
A56: 30.5 L_AND14.9 L_XOR14.13
A57: 30.6 L_AND14.4 L_XOR14.2
A58: 30.8 L_NAND14.1 L_XOR14.5
A59: 30.3 L_AND14.12 L_XOR14.10
A60: 32.5 L_AND15.9 L_XOR15.13
A61: 32.6 L_AND15.4 L_XOR15.2
A62: 32.8 L_NAND15.1 L_XOR15.5
A63: 32.3 L_AND15.12 L_XOR15.10
ALARMB: ADC.15 L2.C
ALARMB1: ADC1.15 L4.C
ALARMB2: ADC2.15 L7.C
ALARMB3: ADC3.15 L10.C
ALARMB4: ADC4.15 L13.C
ALARMB5: ADC5.15 L16.C
ALARMB6: ADC6.15 L19.C
ALARMB7: ADC7.15 L22.C
ALARMB8: ADC8.15 L25.C
ALARMB9: ADC9.15 L28.C
ALARMB10: ADC10.15 L31.C
ALARMB11: ADC11.15 L34.C
ALARMB12: ADC12.15 L37.C
ALARMB13: ADC13.15 L40.C
ALARMB14: ADC14.15 L43.C
ALARMB15: ADC15.15 L46.C
CLK: 1.16 2.3 ADC.21
CLK1: 3.3 4.16 ADC1.21
CLK2: 5.3 6.16 ADC2.21
CLK3: 7.3 8.16 ADC3.21
CLK4: 9.3 10.16 ADC4.21
CLK5: 11.3 12.16 ADC5.21
CLK6: 13.3 14.16 ADC6.21
CLK7: 15.3 16.16 ADC7.21
CLK8: 17.3 18.16 ADC8.21
CLK9: 19.3 20.16 ADC9.21
CLK10: 21.3 22.16 ADC10.21
CLK11: 23.3 24.16 ADC11.21
CLK12: 25.3 26.16 ADC12.21
CLK13: 27.3 28.16 ADC13.21
CLK14: 29.3 30.16 ADC14.21
CLK15: 31.3 32.16 ADC15.21
CMOUT: ADC.8 R5.1
CMOUT1: ADC1.8 R11.1
CMOUT2: ADC2.8 R18.1
CMOUT3: ADC3.8 R25.1
CMOUT4: ADC4.8 R32.1
CMOUT5: ADC5.8 R39.1
CMOUT6: ADC6.8 R46.1
CMOUT7: ADC7.8 R53.1
CMOUT8: ADC8.8 R60.1
CMOUT9: ADC9.8 R67.1
CMOUT10: ADC10.8 R74.1
CMOUT11: ADC11.8 R81.1
CMOUT12: ADC12.8 R88.1
CMOUT13: ADC13.8 R95.1
CMOUT14: ADC14.8 R102.1
CMOUT15: ADC15.8 R109.1
CS: ADC.16 L_NAND.3 L_NAND.6
CS1: ADC1.16 L_NAND1.3 L_NAND1.6
CS2: ADC2.16 L_NAND2.3 L_NAND2.6
CS3: ADC3.16 L_NAND3.3 L_NAND3.6
CS4: ADC4.16 L_NAND4.3 L_NAND4.6
CS5: ADC5.16 L_NAND5.3 L_NAND5.6
CS6: ADC6.16 L_NAND6.3 L_NAND6.6
CS7: ADC7.16 L_NAND7.3 L_NAND7.6
CS8: ADC8.16 L_NAND8.3 L_NAND8.6
CS9: ADC9.16 L_NAND9.3 L_NAND9.6
CS10: ADC10.16 L_NAND10.3 L_NAND10.6
CS11: ADC11.16 L_NAND11.3 L_NAND11.6
CS12: ADC12.16 L_NAND12.3 L_NAND12.6
CS13: ADC13.16 L_NAND13.3 L_NAND13.6
CS14: ADC14.16 L_NAND14.3 L_NAND14.6
CS15: ADC15.16 L_NAND15.3 L_NAND15.6
DIN: 1.13 2.6 ADC.18
DIN1: 3.6 4.13 ADC1.18
DIN2: 5.6 6.13 ADC2.18
DIN3: 7.6 8.13 ADC3.18
DIN4: 9.6 10.13 ADC4.18
DIN5: 11.6 12.13 ADC5.18
DIN6: 13.6 14.13 ADC6.18
DIN7: 15.6 16.13 ADC7.18
DIN8: 17.6 18.13 ADC8.18
DIN9: 19.6 20.13 ADC9.18
DIN10: 21.6 22.13 ADC10.18
DIN11: 23.6 24.13 ADC11.18
DIN12: 25.6 26.13 ADC12.18
DIN13: 27.6 28.13 ADC13.18
DIN14: 29.6 30.13 ADC14.18
DIN15: 31.6 32.13 ADC15.18
DOUT: 1.15 2.4 R2.2
DOUT1: 3.4 4.15 R8.2
DOUT2: 5.4 6.15 R15.2
DOUT3: 7.4 8.15 R22.2
DOUT4: 9.4 10.15 R29.2
DOUT5: 11.4 12.15 R36.2
DOUT6: 13.4 14.15 R43.2
DOUT7: 15.4 16.15 R50.2
DOUT8: 17.4 18.15 R57.2
DOUT9: 19.4 20.15 R64.2
DOUT10: 21.4 22.15 R71.2
DOUT11: 23.4 24.15 R78.2
DOUT12: 25.4 26.15 R85.2
DOUT13: 27.4 28.15 R92.2
DOUT14: 29.4 30.15 R99.2
DOUT15: 31.4 32.15 R106.2
DRDYB: ADC.20 R6.1
DRDYB1: ADC1.20 R10.1
DRDYB2: ADC2.20 R17.1
DRDYB3: ADC3.20 R24.1
DRDYB4: ADC4.20 R31.1
DRDYB5: ADC5.20 R38.1
DRDYB6: ADC6.20 R45.1
DRDYB7: ADC7.20 R52.1
DRDYB8: ADC8.20 R59.1
DRDYB9: ADC9.20 R66.1
DRDYB10: ADC10.20 R73.1
DRDYB11: ADC11.20 R80.1
DRDYB12: ADC12.20 R87.1
DRDYB13: ADC13.20 R94.1
DRDYB14: ADC14.20 R101.1
DRDYB15: ADC15.20 R108.1
GND: 1.4 1.7 1.11 1.14 1.17 2.2 2.5 2.8 2.12 2.15 ADC.14 ADC.27 ADC.29 C4.2 C5.2 C6.2 L1.C L3.C L_AND.7 L_AND.15 L_NAND.4 L_XOR.7 L_XOR.15 TAL.2
GND1: 3.2 3.5 3.8 3.12 3.15 4.4 4.7 4.11 4.14 4.17 ADC1.14 ADC1.27 ADC1.29 C9.2 C11.2 C12.2 L5.C L6.C L_AND1.7 L_AND1.15 L_NAND1.4 L_XOR1.7 L_XOR1.15 TAL1.2
GND2: 5.2 5.5 5.8 5.12 5.15 6.4 6.7 6.11 6.14 6.17 ADC2.14 ADC2.27 ADC2.29 C15.2 C17.2 C18.2 L8.C L9.C L_AND2.7 L_AND2.15 L_NAND2.4 L_XOR2.7 L_XOR2.15 TAL2.2
GND3: 7.2 7.5 7.8 7.12 7.15 8.4 8.7 8.11 8.14 8.17 ADC3.14 ADC3.27 ADC3.29 C21.2 C23.2 C24.2 L11.C L12.C L_AND3.7 L_AND3.15 L_NAND3.4 L_XOR3.7 L_XOR3.15 TAL3.2
GND4: 9.2 9.5 9.8 9.12 9.15 10.4 10.7 10.11 10.14 10.17 ADC4.14 ADC4.27 ADC4.29 C27.2 C29.2 C30.2 L14.C L15.C L_AND4.7 L_AND4.15 L_NAND4.4 L_XOR4.7 L_XOR4.15 TAL4.2
GND5: 11.2 11.5 11.8 11.12 11.15 12.4 12.7 12.11 12.14 12.17 ADC5.14 ADC5.27 ADC5.29 C33.2 C35.2 C36.2 L17.C L18.C L_AND5.7 L_AND5.15 L_NAND5.4 L_XOR5.7 L_XOR5.15 TAL5.2
GND6: 13.2 13.5 13.8 13.12 13.15 14.4 14.7 14.11 14.14 14.17 ADC6.14 ADC6.27 ADC6.29 C39.2 C41.2 C42.2 L20.C L21.C L_AND6.7 L_AND6.15 L_NAND6.4 L_XOR6.7 L_XOR6.15 TAL6.2
GND7: 15.2 15.5 15.8 15.12 15.15 16.4 16.7 16.11 16.14 16.17 ADC7.14 ADC7.27 ADC7.29 C45.2 C47.2 C48.2 L23.C L24.C L_AND7.7 L_AND7.15 L_NAND7.4 L_XOR7.7 L_XOR7.15 TAL7.2
GND8: 17.2 17.5 17.8 17.12 17.15 18.4 18.7 18.11 18.14 18.17 ADC8.14 ADC8.27 ADC8.29 C51.2 C53.2 C54.2 L26.C L27.C L_AND8.7 L_AND8.15 L_NAND8.4 L_XOR8.7 L_XOR8.15 TAL8.2
GND9: 19.2 19.5 19.8 19.12 19.15 20.4 20.7 20.11 20.14 20.17 ADC9.14 ADC9.27 ADC9.29 C57.2 C59.2 C60.2 L29.C L30.C L_AND9.7 L_AND9.15 L_NAND9.4 L_XOR9.7 L_XOR9.15 TAL9.2
GND10: 21.2 21.5 21.8 21.12 21.15 22.4 22.7 22.11 22.14 22.17 ADC10.14 ADC10.27 ADC10.29 C63.2 C65.2 C66.2 L32.C L33.C L_AND10.7 L_AND10.15 L_NAND10.4 L_XOR10.7 L_XOR10.15 TAL10.2
GND11: 23.2 23.5 23.8 23.12 23.15 24.4 24.7 24.11 24.14 24.17 ADC11.14 ADC11.27 ADC11.29 C69.2 C71.2 C72.2 L35.C L36.C L_AND11.7 L_AND11.15 L_NAND11.4 L_XOR11.7 L_XOR11.15 TAL11.2
GND12: 25.2 25.5 25.8 25.12 25.15 26.4 26.7 26.11 26.14 26.17 ADC12.14 ADC12.27 ADC12.29 C75.2 C77.2 C78.2 L38.C L39.C L_AND12.7 L_AND12.15 L_NAND12.4 L_XOR12.7 L_XOR12.15 TAL12.2
GND13: 27.2 27.5 27.8 27.12 27.15 28.4 28.7 28.11 28.14 28.17 ADC13.14 ADC13.27 ADC13.29 C81.2 C83.2 C84.2 L41.C L42.C L_AND13.7 L_AND13.15 L_NAND13.4 L_XOR13.7 L_XOR13.15 TAL13.2
GND14: 29.2 29.5 29.8 29.12 29.15 30.4 30.7 30.11 30.14 30.17 ADC14.14 ADC14.27 ADC14.29 C87.2 C89.2 C90.2 L44.C L45.C L_AND14.7 L_AND14.15 L_NAND14.4 L_XOR14.7 L_XOR14.15 TAL14.2
GND15: 31.2 31.5 31.8 31.12 31.15 32.4 32.7 32.11 32.14 32.17 ADC15.14 ADC15.27 ADC15.29 C93.2 C95.2 C96.2 L47.C L48.C L_AND15.7 L_AND15.15 L_NAND15.4 L_XOR15.7 L_XOR15.15 TAL15.2
GPIO1: 1.2 2.17 L_AND.2
GPIO2: 3.17 4.2 L_AND1.2
GPIO3: 5.17 6.2 L_AND2.2
GPIO4: 7.17 8.2 L_AND3.2
GPIO5: 9.17 10.2 L_AND4.2
GPIO6: 11.17 12.2 L_AND5.2
GPIO7: 13.17 14.2 L_AND6.2
GPIO8: 15.17 16.2 L_AND7.2
GPIO9: 17.17 18.2 L_AND8.2
GPIO10: 19.17 20.2 L_AND9.2
GPIO11: 21.17 22.2 L_AND10.2
GPIO12: 23.17 24.2 L_AND11.2
GPIO13: 25.17 26.2 L_AND12.2
GPIO14: 27.17 28.2 L_AND13.2
GPIO15: 29.17 30.2 L_AND14.2
GPIO16: 31.17 32.2 L_AND15.2
IN1: ADC.1
IN2: ADC.2
IN3: ADC.3
IN4: ADC.4
IN5: 1.1 2.18 ADC.5
IN6: ADC.6
IN7: ADC1.4
IN8: ADC1.6
IN9: ADC1.3
IN10: 3.18 4.1 ADC1.5
IN11: ADC1.1
IN12: ADC1.2
IN13: ADC2.4
IN14: ADC2.6
IN15: ADC2.3
IN16: 5.18 6.1 ADC2.5
IN17: ADC2.1
IN18: ADC2.2
IN19: ADC3.4
IN20: ADC3.6
IN21: ADC3.3
IN22: 7.18 8.1 ADC3.5
IN23: ADC3.1
IN24: ADC3.2
IN25: ADC4.4
IN26: ADC4.6
IN27: ADC4.3
IN28: 9.18 10.1 ADC4.5
IN29: ADC4.1
IN30: ADC4.2
IN31: ADC5.4
IN32: ADC5.6
IN33: ADC5.3
IN34: 11.18 12.1 ADC5.5
IN35: ADC5.1
IN36: ADC5.2
IN37: ADC6.4
IN38: ADC6.6
IN39: ADC6.3
IN40: 13.18 14.1 ADC6.5
IN41: ADC6.1
IN42: ADC6.2
IN43: ADC7.4
IN44: ADC7.6
IN45: ADC7.3
IN46: 15.18 16.1 ADC7.5
IN47: ADC7.1
IN48: ADC7.2
IN49: ADC8.4
IN50: ADC8.6
IN51: ADC8.3
IN52: 17.18 18.1 ADC8.5
IN53: ADC8.1
IN54: ADC8.2
IN55: ADC9.4
IN56: ADC9.6
IN57: ADC9.3
IN58: 19.18 20.1 ADC9.5
IN59: ADC9.1
IN60: ADC9.2
IN61: ADC10.4
IN62: ADC10.6
IN63: ADC10.3
IN64: 21.18 22.1 ADC10.5
IN65: ADC10.1
IN66: ADC10.2
IN67: ADC11.4
IN68: ADC11.6
IN69: ADC11.3
IN70: 23.18 24.1 ADC11.5
IN71: ADC11.1
IN72: ADC11.2
IN73: ADC12.4
IN74: ADC12.6
IN75: ADC12.3
IN76: 25.18 26.1 ADC12.5
IN77: ADC12.1
IN78: ADC12.2
IN79: ADC13.4
IN80: ADC13.6
IN81: ADC13.3
IN82: 27.18 28.1 ADC13.5
IN83: ADC13.1
IN84: ADC13.2
IN85: ADC14.4
IN86: ADC14.6
IN87: ADC14.3
IN88: 29.18 30.1 ADC14.5
IN89: ADC14.1
IN90: ADC14.2
IN91: ADC15.4
IN92: ADC15.6
IN93: ADC15.3
IN94: 31.18 32.1 ADC15.5
IN95: ADC15.1
IN96: ADC15.2
N$1: L_AND.1 L_NAND.7
N$2: L1.A R1.2
N$3: ADC.19 R2.1
N$4: ADC.23 C1.2 TAL.4
N$5: L_AND.3 R3.2
N$6: L2.A R4.1
N$7: L3.A R3.1
N$8: ADC.24 C2.2 TAL.3
N$9: ADC.26 C6.1
N$10: ADC1.19 R8.1
N$11: L_AND.10 L_AND.11 L_XOR.12
N$12: ADC1.23 C8.2 TAL1.4
N$13: L_AND.5 L_AND.8 L_XOR.1
N$14: ADC1.24 C7.2 TAL1.3
N$15: ADC.10 C3.1 R5.2 R7.2
N$16: L_AND.6 L_NAND.2 L_XOR.4
N$17: ADC1.10 C10.1 R11.2 R12.2
N$18: ADC1.26 C12.1
N$19: L5.A R13.2
N$20: L4.A R9.1
N$21: L_AND1.3 R14.2
N$22: L_AND1.6 L_NAND1.2 L_XOR1.4
N$23: L_AND1.5 L_AND1.8 L_XOR1.1
N$24: L_AND1.10 L_AND1.11 L_XOR1.12
N$25: L_AND1.1 L_NAND1.7
N$26: L6.A R14.1
N$27: ADC2.19 R15.1
N$28: ADC2.23 C14.2 TAL2.4
N$29: ADC2.24 C13.2 TAL2.3
N$30: ADC2.10 C16.1 R18.2 R19.2
N$31: ADC2.26 C18.1
N$32: L8.A R20.2
N$33: L7.A R16.1
N$34: L_AND2.3 R21.2
N$35: L_AND2.6 L_NAND2.2 L_XOR2.4
N$36: L_AND2.5 L_AND2.8 L_XOR2.1
N$37: L_AND2.10 L_AND2.11 L_XOR2.12
N$38: L_AND2.1 L_NAND2.7
N$39: L9.A R21.1
N$40: ADC3.19 R22.1
N$41: ADC3.23 C20.2 TAL3.4
N$42: ADC3.24 C19.2 TAL3.3
N$43: ADC3.10 C22.1 R25.2 R26.2
N$44: ADC3.26 C24.1
N$45: L11.A R27.2
N$46: L10.A R23.1
N$47: L_AND3.3 R28.2
N$48: L_AND3.6 L_NAND3.2 L_XOR3.4
N$49: L_AND3.5 L_AND3.8 L_XOR3.1
N$50: L_AND3.10 L_AND3.11 L_XOR3.12
N$51: L_AND3.1 L_NAND3.7
N$52: L12.A R28.1
N$53: ADC4.19 R29.1
N$54: ADC4.23 C26.2 TAL4.4
N$55: ADC4.24 C25.2 TAL4.3
N$56: ADC4.10 C28.1 R32.2 R33.2
N$57: ADC4.26 C30.1
N$58: L14.A R34.2
N$59: L13.A R30.1
N$60: L_AND4.3 R35.2
N$61: L_AND4.6 L_NAND4.2 L_XOR4.4
N$62: L_AND4.5 L_AND4.8 L_XOR4.1
N$63: L_AND4.10 L_AND4.11 L_XOR4.12
N$64: L_AND4.1 L_NAND4.7
N$65: L15.A R35.1
N$66: ADC5.19 R36.1
N$67: ADC5.23 C32.2 TAL5.4
N$68: ADC5.24 C31.2 TAL5.3
N$69: ADC5.10 C34.1 R39.2 R40.2
N$70: ADC5.26 C36.1
N$71: L17.A R41.2
N$72: L16.A R37.1
N$73: L_AND5.3 R42.2
N$74: L_AND5.6 L_NAND5.2 L_XOR5.4
N$75: L_AND5.5 L_AND5.8 L_XOR5.1
N$76: L_AND5.10 L_AND5.11 L_XOR5.12
N$77: L_AND5.1 L_NAND5.7
N$78: L18.A R42.1
N$79: ADC6.19 R43.1
N$80: ADC6.23 C38.2 TAL6.4
N$81: ADC6.24 C37.2 TAL6.3
N$82: ADC6.10 C40.1 R46.2 R47.2
N$83: ADC6.26 C42.1
N$84: L20.A R48.2
N$85: L19.A R44.1
N$86: L_AND6.3 R49.2
N$87: L_AND6.6 L_NAND6.2 L_XOR6.4
N$88: L_AND6.5 L_AND6.8 L_XOR6.1
N$89: L_AND6.10 L_AND6.11 L_XOR6.12
N$90: L_AND6.1 L_NAND6.7
N$91: L21.A R49.1
N$92: ADC7.19 R50.1
N$93: ADC7.23 C44.2 TAL7.4
N$94: ADC7.24 C43.2 TAL7.3
N$95: ADC7.10 C46.1 R53.2 R54.2
N$96: ADC7.26 C48.1
N$97: L23.A R55.2
N$98: L22.A R51.1
N$99: L_AND7.3 R56.2
N$100: L_AND7.6 L_NAND7.2 L_XOR7.4
N$101: L_AND7.5 L_AND7.8 L_XOR7.1
N$102: L_AND7.10 L_AND7.11 L_XOR7.12
N$103: L_AND7.1 L_NAND7.7
N$104: L24.A R56.1
N$105: ADC8.19 R57.1
N$106: ADC8.23 C50.2 TAL8.4
N$107: ADC8.24 C49.2 TAL8.3
N$108: ADC8.10 C52.1 R60.2 R61.2
N$109: ADC8.26 C54.1
N$110: L26.A R62.2
N$111: L25.A R58.1
N$112: L_AND8.3 R63.2
N$113: L_AND8.6 L_NAND8.2 L_XOR8.4
N$114: L_AND8.5 L_AND8.8 L_XOR8.1
N$115: L_AND8.10 L_AND8.11 L_XOR8.12
N$116: L_AND8.1 L_NAND8.7
N$117: L27.A R63.1
N$118: ADC9.19 R64.1
N$119: ADC9.23 C56.2 TAL9.4
N$120: ADC9.24 C55.2 TAL9.3
N$121: ADC9.10 C58.1 R67.2 R68.2
N$122: ADC9.26 C60.1
N$123: L29.A R69.2
N$124: L28.A R65.1
N$125: L_AND9.3 R70.2
N$126: L_AND9.6 L_NAND9.2 L_XOR9.4
N$127: L_AND9.5 L_AND9.8 L_XOR9.1
N$128: L_AND9.10 L_AND9.11 L_XOR9.12
N$129: L_AND9.1 L_NAND9.7
N$130: L30.A R70.1
N$131: ADC10.19 R71.1
N$132: ADC10.23 C62.2 TAL10.4
N$133: ADC10.24 C61.2 TAL10.3
N$134: ADC10.10 C64.1 R74.2 R75.2
N$135: ADC10.26 C66.1
N$136: L32.A R76.2
N$137: L31.A R72.1
N$138: L_AND10.3 R77.2
N$139: L_AND10.6 L_NAND10.2 L_XOR10.4
N$140: L_AND10.5 L_AND10.8 L_XOR10.1
N$141: L_AND10.10 L_AND10.11 L_XOR10.12
N$142: L_AND10.1 L_NAND10.7
N$143: L33.A R77.1
N$144: ADC11.19 R78.1
N$145: ADC11.23 C68.2 TAL11.4
N$146: ADC11.24 C67.2 TAL11.3
N$147: ADC11.10 C70.1 R81.2 R82.2
N$148: ADC11.26 C72.1
N$149: L35.A R83.2
N$150: L34.A R79.1
N$151: L_AND11.3 R84.2
N$152: L_AND11.6 L_NAND11.2 L_XOR11.4
N$153: L_AND11.5 L_AND11.8 L_XOR11.1
N$154: L_AND11.10 L_AND11.11 L_XOR11.12
N$155: L_AND11.1 L_NAND11.7
N$156: L36.A R84.1
N$157: ADC12.19 R85.1
N$158: ADC12.23 C74.2 TAL12.4
N$159: ADC12.24 C73.2 TAL12.3
N$160: ADC12.10 C76.1 R88.2 R89.2
N$161: ADC12.26 C78.1
N$162: L38.A R90.2
N$163: L37.A R86.1
N$164: L_AND12.3 R91.2
N$165: L_AND12.6 L_NAND12.2 L_XOR12.4
N$166: L_AND12.5 L_AND12.8 L_XOR12.1
N$167: L_AND12.10 L_AND12.11 L_XOR12.12
N$168: L_AND12.1 L_NAND12.7
N$169: L39.A R91.1
N$170: ADC13.19 R92.1
N$171: ADC13.23 C80.2 TAL13.4
N$172: ADC13.24 C79.2 TAL13.3
N$173: ADC13.10 C82.1 R95.2 R96.2
N$174: ADC13.26 C84.1
N$175: L41.A R97.2
N$176: L40.A R93.1
N$177: L_AND13.3 R98.2
N$178: L_AND13.6 L_NAND13.2 L_XOR13.4
N$179: L_AND13.5 L_AND13.8 L_XOR13.1
N$180: L_AND13.10 L_AND13.11 L_XOR13.12
N$181: L_AND13.1 L_NAND13.7
N$182: L42.A R98.1
N$183: ADC14.19 R99.1
N$184: ADC14.23 C86.2 TAL14.4
N$185: ADC14.24 C85.2 TAL14.3
N$186: ADC14.10 C88.1 R102.2 R103.2
N$187: ADC14.26 C90.1
N$188: L44.A R104.2
N$189: L43.A R100.1
N$190: L_AND14.3 R105.2
N$191: L_AND14.6 L_NAND14.2 L_XOR14.4
N$192: L_AND14.5 L_AND14.8 L_XOR14.1
N$193: L_AND14.10 L_AND14.11 L_XOR14.12
N$194: L_AND14.1 L_NAND14.7
N$195: L45.A R105.1
N$196: ADC15.19 R106.1
N$197: ADC15.23 C92.2 TAL15.4
N$198: ADC15.24 C91.2 TAL15.3
N$199: ADC15.10 C94.1 R109.2 R110.2
N$200: ADC15.26 C96.1
N$201: L47.A R111.2
N$202: L46.A R107.1
N$203: L_AND15.3 R112.2
N$204: L_AND15.6 L_NAND15.2 L_XOR15.4
N$205: L_AND15.5 L_AND15.8 L_XOR15.1
N$206: L_AND15.10 L_AND15.11 L_XOR15.12
N$207: L_AND15.1 L_NAND15.7
N$208: L48.A R112.1
RLDOUT: ADC.9 C3.2 R7.1
RLDOUT1: ADC1.9 C10.2 R12.1
RLDOUT2: ADC2.9 C16.2 R19.1
RLDOUT3: ADC3.9 C22.2 R26.1
RLDOUT4: ADC4.9 C28.2 R33.1
RLDOUT5: ADC5.9 C34.2 R40.1
RLDOUT6: ADC6.9 C40.2 R47.1
RLDOUT7: ADC7.9 C46.2 R54.1
RLDOUT8: ADC8.9 C52.2 R61.1
RLDOUT9: ADC9.9 C58.2 R68.1
RLDOUT10: ADC10.9 C64.2 R75.1
RLDOUT11: ADC11.9 C70.2 R82.1
RLDOUT12: ADC12.9 C76.2 R89.1
RLDOUT13: ADC13.9 C82.2 R96.1
RLDOUT14: ADC14.9 C88.2 R103.1
RLDOUT15: ADC15.9 C94.2 R110.1
RLDREF: ADC.11 ADC.12 C5.1
RLDREF1: ADC1.11 ADC1.12 C9.1
RLDREF2: ADC2.11 ADC2.12 C15.1
RLDREF3: ADC3.11 ADC3.12 C21.1
RLDREF4: ADC4.11 ADC4.12 C27.1
RLDREF5: ADC5.11 ADC5.12 C33.1
RLDREF6: ADC6.11 ADC6.12 C39.1
RLDREF7: ADC7.11 ADC7.12 C45.1
RLDREF8: ADC8.11 ADC8.12 C51.1
RLDREF9: ADC9.11 ADC9.12 C57.1
RLDREF10: ADC10.11 ADC10.12 C63.1
RLDREF11: ADC11.11 ADC11.12 C69.1
RLDREF12: ADC12.11 ADC12.12 C75.1
RLDREF13: ADC13.11 ADC13.12 C81.1
RLDREF14: ADC14.11 ADC14.12 C87.1
RLDREF15: ADC15.11 ADC15.12 C93.1
RST: 1.9 2.10 ADC.25
RST1: 3.10 4.9 ADC1.25
RST2: 5.10 6.9 ADC2.25
RST3: 7.10 8.9 ADC3.25
RST4: 9.10 10.9 ADC4.25
RST5: 11.10 12.9 ADC5.25
RST6: 13.10 14.9 ADC6.25
RST7: 15.10 16.9 ADC7.25
RST8: 17.10 18.9 ADC8.25
RST9: 19.10 20.9 ADC9.25
RST10: 21.10 22.9 ADC10.25
RST11: 23.10 24.9 ADC11.25
RST12: 25.10 26.9 ADC12.25
RST13: 27.10 28.9 ADC13.25
RST14: 29.10 30.9 ADC14.25
RST15: 31.10 32.9 ADC15.25
S0: 2.16 L_XOR.8
S1: 2.14 L_XOR.11
S2: 2.13 L_XOR.3
S3: 2.11 L_XOR.6
S4: 3.16 L_XOR1.8
S5: 3.14 L_XOR1.11
S6: 3.13 L_XOR1.3
S7: 3.11 L_XOR1.6
S8: 5.16 L_XOR2.8
S9: 5.14 L_XOR2.11
S10: 5.13 L_XOR2.3
S11: 5.11 L_XOR2.6
S12: 7.16 L_XOR3.8
S13: 7.14 L_XOR3.11
S14: 7.13 L_XOR3.3
S15: 7.11 L_XOR3.6
S16: 9.16 L_XOR4.8
S17: 9.14 L_XOR4.11
S18: 9.13 L_XOR4.3
S19: 9.11 L_XOR4.6
S20: 11.16 L_XOR5.8
S21: 11.14 L_XOR5.11
S22: 11.13 L_XOR5.3
S23: 11.11 L_XOR5.6
S24: 13.16 L_XOR6.8
S25: 13.14 L_XOR6.11
S26: 13.13 L_XOR6.3
S27: 13.11 L_XOR6.6
S28: 15.16 L_XOR7.8
S29: 15.14 L_XOR7.11
S30: 15.13 L_XOR7.3
S31: 15.11 L_XOR7.6
S32: 17.16 L_XOR8.8
S33: 17.14 L_XOR8.11
S34: 17.13 L_XOR8.3
S35: 17.11 L_XOR8.6
S36: 19.16 L_XOR9.8
S37: 19.14 L_XOR9.11
S38: 19.13 L_XOR9.3
S39: 19.11 L_XOR9.6
S40: 21.16 L_XOR10.8
S41: 21.14 L_XOR10.11
S42: 21.13 L_XOR10.3
S43: 21.11 L_XOR10.6
S44: 23.16 L_XOR11.8
S45: 23.14 L_XOR11.11
S46: 23.13 L_XOR11.3
S47: 23.11 L_XOR11.6
S48: 25.16 L_XOR12.8
S49: 25.14 L_XOR12.11
S50: 25.13 L_XOR12.3
S51: 25.11 L_XOR12.6
S52: 27.16 L_XOR13.8
S53: 27.14 L_XOR13.11
S54: 27.13 L_XOR13.3
S55: 27.11 L_XOR13.6
S56: 29.16 L_XOR14.8
S57: 29.14 L_XOR14.11
S58: 29.13 L_XOR14.3
S59: 29.11 L_XOR14.6
S60: 31.16 L_XOR15.8
S61: 31.14 L_XOR15.11
S62: 31.13 L_XOR15.3
S63: 31.11 L_XOR15.6
SCLK: 1.12 2.7 ADC.17
SCLK1: 3.7 4.12 ADC1.17
SCLK2: 5.7 6.12 ADC2.17
SCLK3: 7.7 8.12 ADC3.17
SCLK4: 9.7 10.12 ADC4.17
SCLK5: 11.7 12.12 ADC5.17
SCLK6: 13.7 14.12 ADC6.17
SCLK7: 15.7 16.12 ADC7.17
SCLK8: 17.7 18.12 ADC8.17
SCLK9: 19.7 20.12 ADC9.17
SCLK10: 21.7 22.12 ADC10.17
SCLK11: 23.7 24.12 ADC11.17
SCLK12: 25.7 26.12 ADC12.17
SCLK13: 27.7 28.12 ADC13.17
SCLK14: 29.7 30.12 ADC14.17
SCLK15: 31.7 32.12 ADC15.17
SYNCB: 1.10 2.9 ADC.13
SYNCB1: 3.9 4.10 ADC1.13
SYNCB2: 5.9 6.10 ADC2.13
SYNCB3: 7.9 8.10 ADC3.13
SYNCB4: 9.9 10.10 ADC4.13
SYNCB5: 11.9 12.10 ADC5.13
SYNCB6: 13.9 14.10 ADC6.13
SYNCB7: 15.9 16.10 ADC7.13
SYNCB8: 17.9 18.10 ADC8.13
SYNCB9: 19.9 20.10 ADC9.13
SYNCB10: 21.9 22.10 ADC10.13
SYNCB11: 23.9 24.10 ADC11.13
SYNCB12: 25.9 26.10 ADC12.13
SYNCB13: 27.9 28.10 ADC13.13
SYNCB14: 29.9 30.10 ADC14.13
SYNCB15: 31.9 32.10 ADC15.13
VDD: 1.18 2.1 ADC.22 ADC.28 C1.1 C2.1 C4.1 L_AND.13 L_AND.14 L_NAND.5 L_NAND.8 L_XOR.9 L_XOR.14 R1.1 R4.2 R6.2 TAL.1
VDD1: 3.1 4.18 ADC1.22 ADC1.28 C7.1 C8.1 C11.1 L_AND1.13 L_AND1.14 L_NAND1.5 L_NAND1.8 L_XOR1.9 L_XOR1.14 R9.2 R10.2 R13.1 TAL1.1
VDD2: 5.1 6.18 ADC2.22 ADC2.28 C13.1 C14.1 C17.1 L_AND2.13 L_AND2.14 L_NAND2.5 L_NAND2.8 L_XOR2.9 L_XOR2.14 R16.2 R17.2 R20.1 TAL2.1
VDD3: 7.1 8.18 ADC3.22 ADC3.28 C19.1 C20.1 C23.1 L_AND3.13 L_AND3.14 L_NAND3.5 L_NAND3.8 L_XOR3.9 L_XOR3.14 R23.2 R24.2 R27.1 TAL3.1
VDD4: 9.1 10.18 ADC4.22 ADC4.28 C25.1 C26.1 C29.1 L_AND4.13 L_AND4.14 L_NAND4.5 L_NAND4.8 L_XOR4.9 L_XOR4.14 R30.2 R31.2 R34.1 TAL4.1
VDD5: 11.1 12.18 ADC5.22 ADC5.28 C31.1 C32.1 C35.1 L_AND5.13 L_AND5.14 L_NAND5.5 L_NAND5.8 L_XOR5.9 L_XOR5.14 R37.2 R38.2 R41.1 TAL5.1
VDD6: 13.1 14.18 ADC6.22 ADC6.28 C37.1 C38.1 C41.1 L_AND6.13 L_AND6.14 L_NAND6.5 L_NAND6.8 L_XOR6.9 L_XOR6.14 R44.2 R45.2 R48.1 TAL6.1
VDD7: 15.1 16.18 ADC7.22 ADC7.28 C43.1 C44.1 C47.1 L_AND7.13 L_AND7.14 L_NAND7.5 L_NAND7.8 L_XOR7.9 L_XOR7.14 R51.2 R52.2 R55.1 TAL7.1
VDD8: 17.1 18.18 ADC8.22 ADC8.28 C49.1 C50.1 C53.1 L_AND8.13 L_AND8.14 L_NAND8.5 L_NAND8.8 L_XOR8.9 L_XOR8.14 R58.2 R59.2 R62.1 TAL8.1
VDD9: 19.1 20.18 ADC9.22 ADC9.28 C55.1 C56.1 C59.1 L_AND9.13 L_AND9.14 L_NAND9.5 L_NAND9.8 L_XOR9.9 L_XOR9.14 R65.2 R66.2 R69.1 TAL9.1
VDD10: 21.1 22.18 ADC10.22 ADC10.28 C61.1 C62.1 C65.1 L_AND10.13 L_AND10.14 L_NAND10.5 L_NAND10.8 L_XOR10.9 L_XOR10.14 R72.2 R73.2 R76.1 TAL10.1
VDD11: 23.1 24.18 ADC11.22 ADC11.28 C67.1 C68.1 C71.1 L_AND11.13 L_AND11.14 L_NAND11.5 L_NAND11.8 L_XOR11.9 L_XOR11.14 R79.2 R80.2 R83.1 TAL11.1
VDD12: 25.1 26.18 ADC12.22 ADC12.28 C73.1 C74.1 C77.1 L_AND12.13 L_AND12.14 L_NAND12.5 L_NAND12.8 L_XOR12.9 L_XOR12.14 R86.2 R87.2 R90.1 TAL12.1
VDD13: 27.1 28.18 ADC13.22 ADC13.28 C79.1 C80.1 C83.1 L_AND13.13 L_AND13.14 L_NAND13.5 L_NAND13.8 L_XOR13.9 L_XOR13.14 R93.2 R94.2 R97.1 TAL13.1
VDD14: 29.1 30.18 ADC14.22 ADC14.28 C85.1 C86.1 C89.1 L_AND14.13 L_AND14.14 L_NAND14.5 L_NAND14.8 L_XOR14.9 L_XOR14.14 R100.2 R101.2 R104.1 TAL14.1
VDD15: 31.1 32.18 ADC15.22 ADC15.28 C91.1 C92.1 C95.1 L_AND15.13 L_AND15.14 L_NAND15.5 L_NAND15.8 L_XOR15.9 L_XOR15.14 R107.2 R108.2 R111.1 TAL15.1
WCT: ADC.7
WCT1: ADC1.7
WCT2: ADC2.7
WCT3: ADC3.7
WCT4: ADC4.7
WCT5: ADC5.7
WCT6: ADC6.7
WCT7: ADC7.7
WCT8: ADC8.7
WCT9: ADC9.7
WCT10: ADC10.7
WCT11: ADC11.7
WCT12: ADC12.7
WCT13: ADC13.7
WCT14: ADC14.7
WCT15: ADC15.7

## Tracks (layer width: path | path; a pad name or v marks a point on that pad's centre or on a via)
A0  (via drill 0.2)
  Top 0.127: L_XOR.10 4.3,15.53 v4.11,15.72 4.05,15.72 4.05,15.84 3.73,16.16 L_AND.12 | 1.3 v7.25,8.98
  Bottom 0.127: v4.11,15.72 v4.12,15.71 4.12,10.7 5.14,9.68 6.62,9.68 7.25,9.05 v7.25,8.98
A1  (via drill 0.2)
  Top 0.127: L_XOR.13 2.8,15.55 2.23,16.12 2.23,16.23 | L_AND.9 2.23,16.23 | 2.23,16.23 1.45,15.45 1.45,13.39 1.96,12.88 2.23,12.88 2.64,12.47 2.64,11.89 2.77,11.76 5.89,11.76 6.61,12.48 6.61,13 7.52,13.91 v8.5,13.91 | v8.25,8.98 8.25,8.01 8.25,8 1.5
  Route15 0.127: v8.5,13.91 8.59,13.83 8.59,13.37 7.97,12.75 7.97,9.26 v8.25,8.98
A2
  Top 0.127: L_AND.4 3.23,20.47 2.08,21.61 1.53,21.61 0.6,20.68 0.6,12.7 2.12,11.18 L_XOR.2 2.73,11.11 2.73,10.12 3.24,9.61 3.24,7.51 3.38,7.37 5.49,7.37 5.68,7.56 5.68,9.85 6.37,10.54 8.28,10.54 8.75,10.07 1.6
A3  (via drill 0.2)
  Top 0.127: L_XOR.5 4.3,10.75 4.45,10.6 5.69,10.6 6.21,11.12 8.42,11.12 v8.52,11.22 | L_NAND.1 9.75,10.29 1.8 v9.75,8.55
  Route15 0.127: v9.75,8.55 9.75,9.99 v8.52,11.22
A4  (via drill 0.2)
  Top 0.127: L_XOR1.13 25.8,15.55 25.23,16.12 25.23,16.23 | L_AND1.9 25.23,16.23 | 25.23,16.23 24.45,15.45 24.45,13.39 24.96,12.88 25.23,12.88 25.64,12.47 25.64,11.89 25.77,11.76 28.89,11.76 29.61,12.48 29.61,13 30.52,13.91 v31.5,13.91 | v31.25,8.98 31.25,8.01 31.25,8 4.5
  Route15 0.127: v31.5,13.91 31.59,13.83 31.59,13.37 30.97,12.75 30.97,9.26 v31.25,8.98
A5
  Top 0.127: L_AND1.4 26.23,20.47 25.09,21.61 24.53,21.61 23.6,20.68 23.6,12.7 25.12,11.18 L_XOR1.2 25.73,11.11 25.73,10.12 26.24,9.61 26.24,7.51 26.38,7.37 28.49,7.37 28.68,7.56 28.68,9.85 29.37,10.54 31.28,10.54 31.75,10.07 4.6
A6  (via drill 0.2)
  Top 0.127: L_XOR1.5 27.3,10.75 27.45,10.6 28.69,10.6 29.21,11.12 31.42,11.12 v31.52,11.22 | L_NAND1.1 32.75,10.29 4.8 v32.75,8.55
  Route15 0.127: v32.75,8.55 32.75,9.99 v31.52,11.22
A7  (via drill 0.2)
  Top 0.127: L_XOR1.10 27.3,15.53 v27.11,15.72 27.05,15.72 27.05,15.84 26.73,16.16 L_AND1.12 | 4.3 v30.25,8.98
  Bottom 0.127: v27.11,15.72 v27.12,15.71 27.12,10.7 28.14,9.68 29.62,9.68 30.25,9.05 v30.25,8.98
A8  (via drill 0.2)
  Top 0.127: L_XOR2.13 48.8,15.55 48.23,16.12 48.23,16.23 | L_AND2.9 48.23,16.23 | 48.23,16.23 47.45,15.45 47.45,13.39 47.96,12.88 48.23,12.88 48.64,12.47 48.64,11.89 48.77,11.76 51.89,11.76 52.61,12.48 52.61,13 53.52,13.91 v54.5,13.91 | v54.25,8.98 54.25,8.01 54.25,8 6.5
  Route15 0.127: v54.5,13.91 54.59,13.83 54.59,13.37 53.97,12.75 53.97,9.26 v54.25,8.98
A9
  Top 0.127: L_AND2.4 49.23,20.47 48.09,21.61 47.53,21.61 46.6,20.68 46.6,12.7 48.12,11.18 L_XOR2.2 48.73,11.11 48.73,10.12 49.24,9.61 49.24,7.51 49.38,7.37 51.49,7.37 51.68,7.56 51.68,9.85 52.37,10.54 54.28,10.54 54.75,10.07 6.6
A10  (via drill 0.2)
  Top 0.127: L_XOR2.5 50.3,10.75 50.45,10.6 51.69,10.6 52.21,11.12 54.42,11.12 v54.52,11.22 | L_NAND2.1 55.75,10.29 6.8 v55.75,8.55
  Route15 0.127: v55.75,8.55 55.75,9.99 v54.52,11.22
A11  (via drill 0.2)
  Top 0.127: L_XOR2.10 50.3,15.53 v50.11,15.72 50.05,15.72 50.05,15.84 49.73,16.16 L_AND2.12 | 6.3 v53.25,8.98
  Bottom 0.127: v50.11,15.72 v50.12,15.71 50.12,10.7 51.14,9.68 52.62,9.68 53.25,9.05 v53.25,8.98
A12  (via drill 0.2)
  Top 0.127: L_XOR3.13 71.8,15.55 71.22,16.12 71.22,16.23 | L_AND3.9 71.22,16.23 | 71.22,16.23 70.45,15.45 70.45,13.39 70.96,12.88 71.23,12.88 71.64,12.47 71.64,11.89 71.77,11.76 74.89,11.76 75.61,12.48 75.61,13 76.52,13.91 v77.5,13.91 | v77.25,8.98 77.25,8.01 77.25,8 8.5
  Route15 0.127: v77.5,13.91 77.59,13.83 77.59,13.37 76.97,12.75 76.97,9.26 v77.25,8.98
A13
  Top 0.127: L_AND3.4 72.22,20.47 71.08,21.61 70.53,21.61 69.6,20.68 69.6,12.7 71.12,11.18 L_XOR3.2 71.73,11.11 71.73,10.12 72.24,9.61 72.24,7.51 72.38,7.37 74.49,7.37 74.68,7.56 74.68,9.85 75.37,10.54 77.28,10.54 77.75,10.07 8.6
A14  (via drill 0.2)
  Top 0.127: L_XOR3.5 73.3,10.75 73.45,10.6 74.69,10.6 75.21,11.12 77.42,11.12 v77.52,11.22 | L_NAND3.1 78.75,10.29 8.8 v78.75,8.55
  Route15 0.127: v78.75,8.55 78.75,9.99 v77.52,11.22
A15  (via drill 0.2)
  Top 0.127: L_XOR3.10 73.3,15.53 v73.11,15.72 73.05,15.72 73.05,15.84 72.72,16.16 L_AND3.12 | 8.3 v76.25,8.98
  Bottom 0.127: v73.11,15.72 v73.12,15.71 73.12,10.7 74.14,9.68 75.62,9.68 76.25,9.05 v76.25,8.98
A16  (via drill 0.2)
  Top 0.127: L_XOR4.13 2.8,34.55 2.23,35.12 2.23,35.23 | L_AND4.9 2.23,35.23 | 2.23,35.23 1.45,34.45 1.45,32.39 1.96,31.88 2.23,31.88 2.64,31.47 2.64,30.89 2.77,30.76 5.89,30.76 6.61,31.48 6.61,32 7.52,32.91 v8.5,32.91 | v8.25,27.98 8.25,27.01 8.25,27 10.5
  Route15 0.127: v8.5,32.91 8.59,32.83 8.59,32.37 7.97,31.75 7.97,28.26 v8.25,27.98
A17
  Top 0.127: L_AND4.4 3.23,39.47 2.08,40.61 1.53,40.61 0.6,39.68 0.6,31.7 2.12,30.18 L_XOR4.2 2.73,30.11 2.73,29.12 3.24,28.61 3.24,26.51 3.38,26.37 5.49,26.37 5.68,26.56 5.68,28.85 6.37,29.54 8.28,29.54 8.75,29.07 10.6
A18  (via drill 0.2)
  Top 0.127: L_XOR4.5 4.3,29.75 4.45,29.6 5.69,29.6 6.21,30.12 8.42,30.12 v8.52,30.22 | L_NAND4.1 9.75,29.3 10.8 v9.75,27.55
  Route15 0.127: v9.75,27.55 9.75,28.99 v8.52,30.22
A19  (via drill 0.2)
  Top 0.127: L_XOR4.10 4.3,34.53 v4.11,34.72 4.05,34.72 4.05,34.84 3.73,35.16 L_AND4.12 | 10.3 v7.25,27.98
  Bottom 0.127: v4.11,34.72 v4.12,34.71 4.12,29.7 5.14,28.68 6.62,28.68 7.25,28.05 v7.25,27.98
A20  (via drill 0.2)
  Top 0.127: L_XOR5.13 25.8,34.55 25.23,35.12 25.23,35.23 | L_AND5.9 25.23,35.23 | 25.23,35.23 24.45,34.45 24.45,32.39 24.96,31.88 25.23,31.88 25.64,31.47 25.64,30.89 25.77,30.76 28.89,30.76 29.61,31.48 29.61,32 30.52,32.91 v31.5,32.91 | v31.25,27.98 31.25,27.01 31.25,27 12.5
  Route15 0.127: v31.5,32.91 31.59,32.83 31.59,32.37 30.97,31.75 30.97,28.26 v31.25,27.98
A21
  Top 0.127: L_AND5.4 26.23,39.47 25.09,40.61 24.53,40.61 23.6,39.68 23.6,31.7 25.12,30.18 L_XOR5.2 25.73,30.11 25.73,29.12 26.24,28.61 26.24,26.51 26.38,26.37 28.49,26.37 28.68,26.56 28.68,28.85 29.37,29.54 31.28,29.54 31.75,29.07 12.6 | 12.6
A22  (via drill 0.2)
  Top 0.127: L_XOR5.5 27.3,29.75 27.45,29.6 28.69,29.6 29.21,30.12 31.42,30.12 v31.52,30.22 | L_NAND5.1 32.75,29.3 12.8 v32.75,27.55
  Route15 0.127: v32.75,27.55 32.75,28.99 v31.52,30.22
A23  (via drill 0.2)
  Top 0.127: L_XOR5.10 27.3,34.53 v27.11,34.72 27.05,34.72 27.05,34.84 26.73,35.16 L_AND5.12 | 12.3 v30.25,27.98
  Bottom 0.127: v27.11,34.72 v27.12,34.71 27.12,29.7 28.14,28.68 29.62,28.68 30.25,28.05 v30.25,27.98
A24  (via drill 0.2)
  Top 0.127: L_XOR6.13 48.8,34.55 48.23,35.12 48.23,35.23 | L_AND6.9 48.23,35.23 | 48.23,35.23 47.45,34.45 47.45,32.39 47.96,31.88 48.23,31.88 48.64,31.47 48.64,30.89 48.77,30.76 51.89,30.76 52.61,31.48 52.61,32 53.52,32.91 v54.5,32.91 | v54.25,27.98 54.25,27.01 54.25,27 14.5
  Route15 0.127: v54.5,32.91 54.59,32.83 54.59,32.37 53.97,31.75 53.97,28.26 v54.25,27.98
A25
  Top 0.127: L_AND6.4 49.23,39.47 48.09,40.61 47.53,40.61 46.6,39.68 46.6,31.7 48.12,30.18 L_XOR6.2 48.73,30.11 48.73,29.12 49.24,28.61 49.24,26.51 49.38,26.37 51.49,26.37 51.68,26.56 51.68,28.85 52.37,29.54 54.28,29.54 54.75,29.07 14.6
A26  (via drill 0.2)
  Top 0.127: L_XOR6.5 50.3,29.75 50.45,29.6 51.69,29.6 52.21,30.12 54.42,30.12 v54.52,30.22 | L_NAND6.1 55.75,29.3 14.8 v55.75,27.55
  Route15 0.127: v55.75,27.55 55.75,28.99 v54.52,30.22
A27  (via drill 0.2)
  Top 0.127: L_XOR6.10 50.3,34.53 v50.11,34.72 50.05,34.72 50.05,34.84 49.73,35.16 L_AND6.12 | 14.3 v53.25,27.98
  Bottom 0.127: v50.11,34.72 v50.12,34.71 50.12,29.7 51.14,28.68 52.62,28.68 53.25,28.05 v53.25,27.98
A28  (via drill 0.2)
  Top 0.127: L_XOR7.13 71.8,34.55 71.22,35.12 71.22,35.23 | L_AND7.9 71.22,35.23 | 71.22,35.23 70.45,34.45 70.45,32.39 70.96,31.88 71.23,31.88 71.64,31.47 71.64,30.89 71.77,30.76 74.89,30.76 75.61,31.48 75.61,32 76.52,32.91 v77.5,32.91 | v77.25,27.98 77.25,27.01 77.25,27 16.5
  Route15 0.127: v77.5,32.91 77.59,32.83 77.59,32.37 76.97,31.75 76.97,28.26 v77.25,27.98
A29
  Top 0.127: L_AND7.4 72.22,39.47 71.08,40.61 70.53,40.61 69.6,39.68 69.6,31.7 71.12,30.18 L_XOR7.2 71.73,30.11 71.73,29.12 72.24,28.61 72.24,26.51 72.38,26.37 74.49,26.37 74.68,26.56 74.68,28.85 75.37,29.54 77.28,29.54 77.75,29.07 16.6
A30  (via drill 0.2)
  Top 0.127: L_XOR7.5 73.3,29.75 73.45,29.6 74.69,29.6 75.21,30.12 77.42,30.12 v77.52,30.22 | L_NAND7.1 78.75,29.3 16.8 v78.75,27.55
  Route15 0.127: v78.75,27.55 78.75,28.99 v77.52,30.22
A31  (via drill 0.2)
  Top 0.127: L_XOR7.10 73.3,34.53 v73.11,34.72 73.05,34.72 73.05,34.84 72.72,35.16 L_AND7.12 | 16.3 v76.25,27.98
  Bottom 0.127: v73.11,34.72 v73.12,34.71 73.12,29.7 74.14,28.68 75.62,28.68 76.25,28.05 v76.25,27.98
A32  (via drill 0.2)
  Top 0.127: L_XOR8.13 2.8,53.55 2.23,54.12 2.23,54.23 | L_AND8.9 2.23,54.23 | 2.23,54.23 1.45,53.45 1.45,51.39 1.96,50.88 2.23,50.88 2.64,50.47 2.64,49.89 2.77,49.76 5.89,49.76 6.61,50.48 6.61,51 7.52,51.91 v8.5,51.91 | v8.25,46.98 8.25,46.01 8.25,46 18.5
  Route15 0.127: v8.5,51.91 8.59,51.83 8.59,51.37 7.97,50.75 7.97,47.26 v8.25,46.98
A33
  Top 0.127: L_AND8.4 3.23,58.47 2.08,59.61 1.53,59.61 0.6,58.68 0.6,50.7 2.12,49.17 L_XOR8.2 2.73,49.1 2.73,48.12 3.24,47.61 3.24,45.51 3.38,45.37 5.49,45.37 5.68,45.56 5.68,47.85 6.37,48.54 8.28,48.54 8.75,48.07 18.6
A34  (via drill 0.2)
  Top 0.127: L_XOR8.5 4.3,48.75 4.45,48.6 5.69,48.6 6.21,49.12 8.42,49.12 v8.52,49.22 | L_NAND8.1 9.75,48.3 18.8 v9.75,46.55
  Route15 0.127: v9.75,46.55 9.75,47.99 v8.52,49.22
A35  (via drill 0.2)